# Altium PCB Copy of PCB1.PcbDoc (part 1 of 3)
Units mil, origin at the board's own origin, x right, y up, seen from the top; angles counter-clockwise.
Board outline 3937.01 x 3937.01 mil, 4 copper layers (L1, L2, L3, L4), stack 61.822 mil thick; 181 components, 253 nets, 1103 pads, 337 vias.
Unrouted connection lines stored in the file: 142.
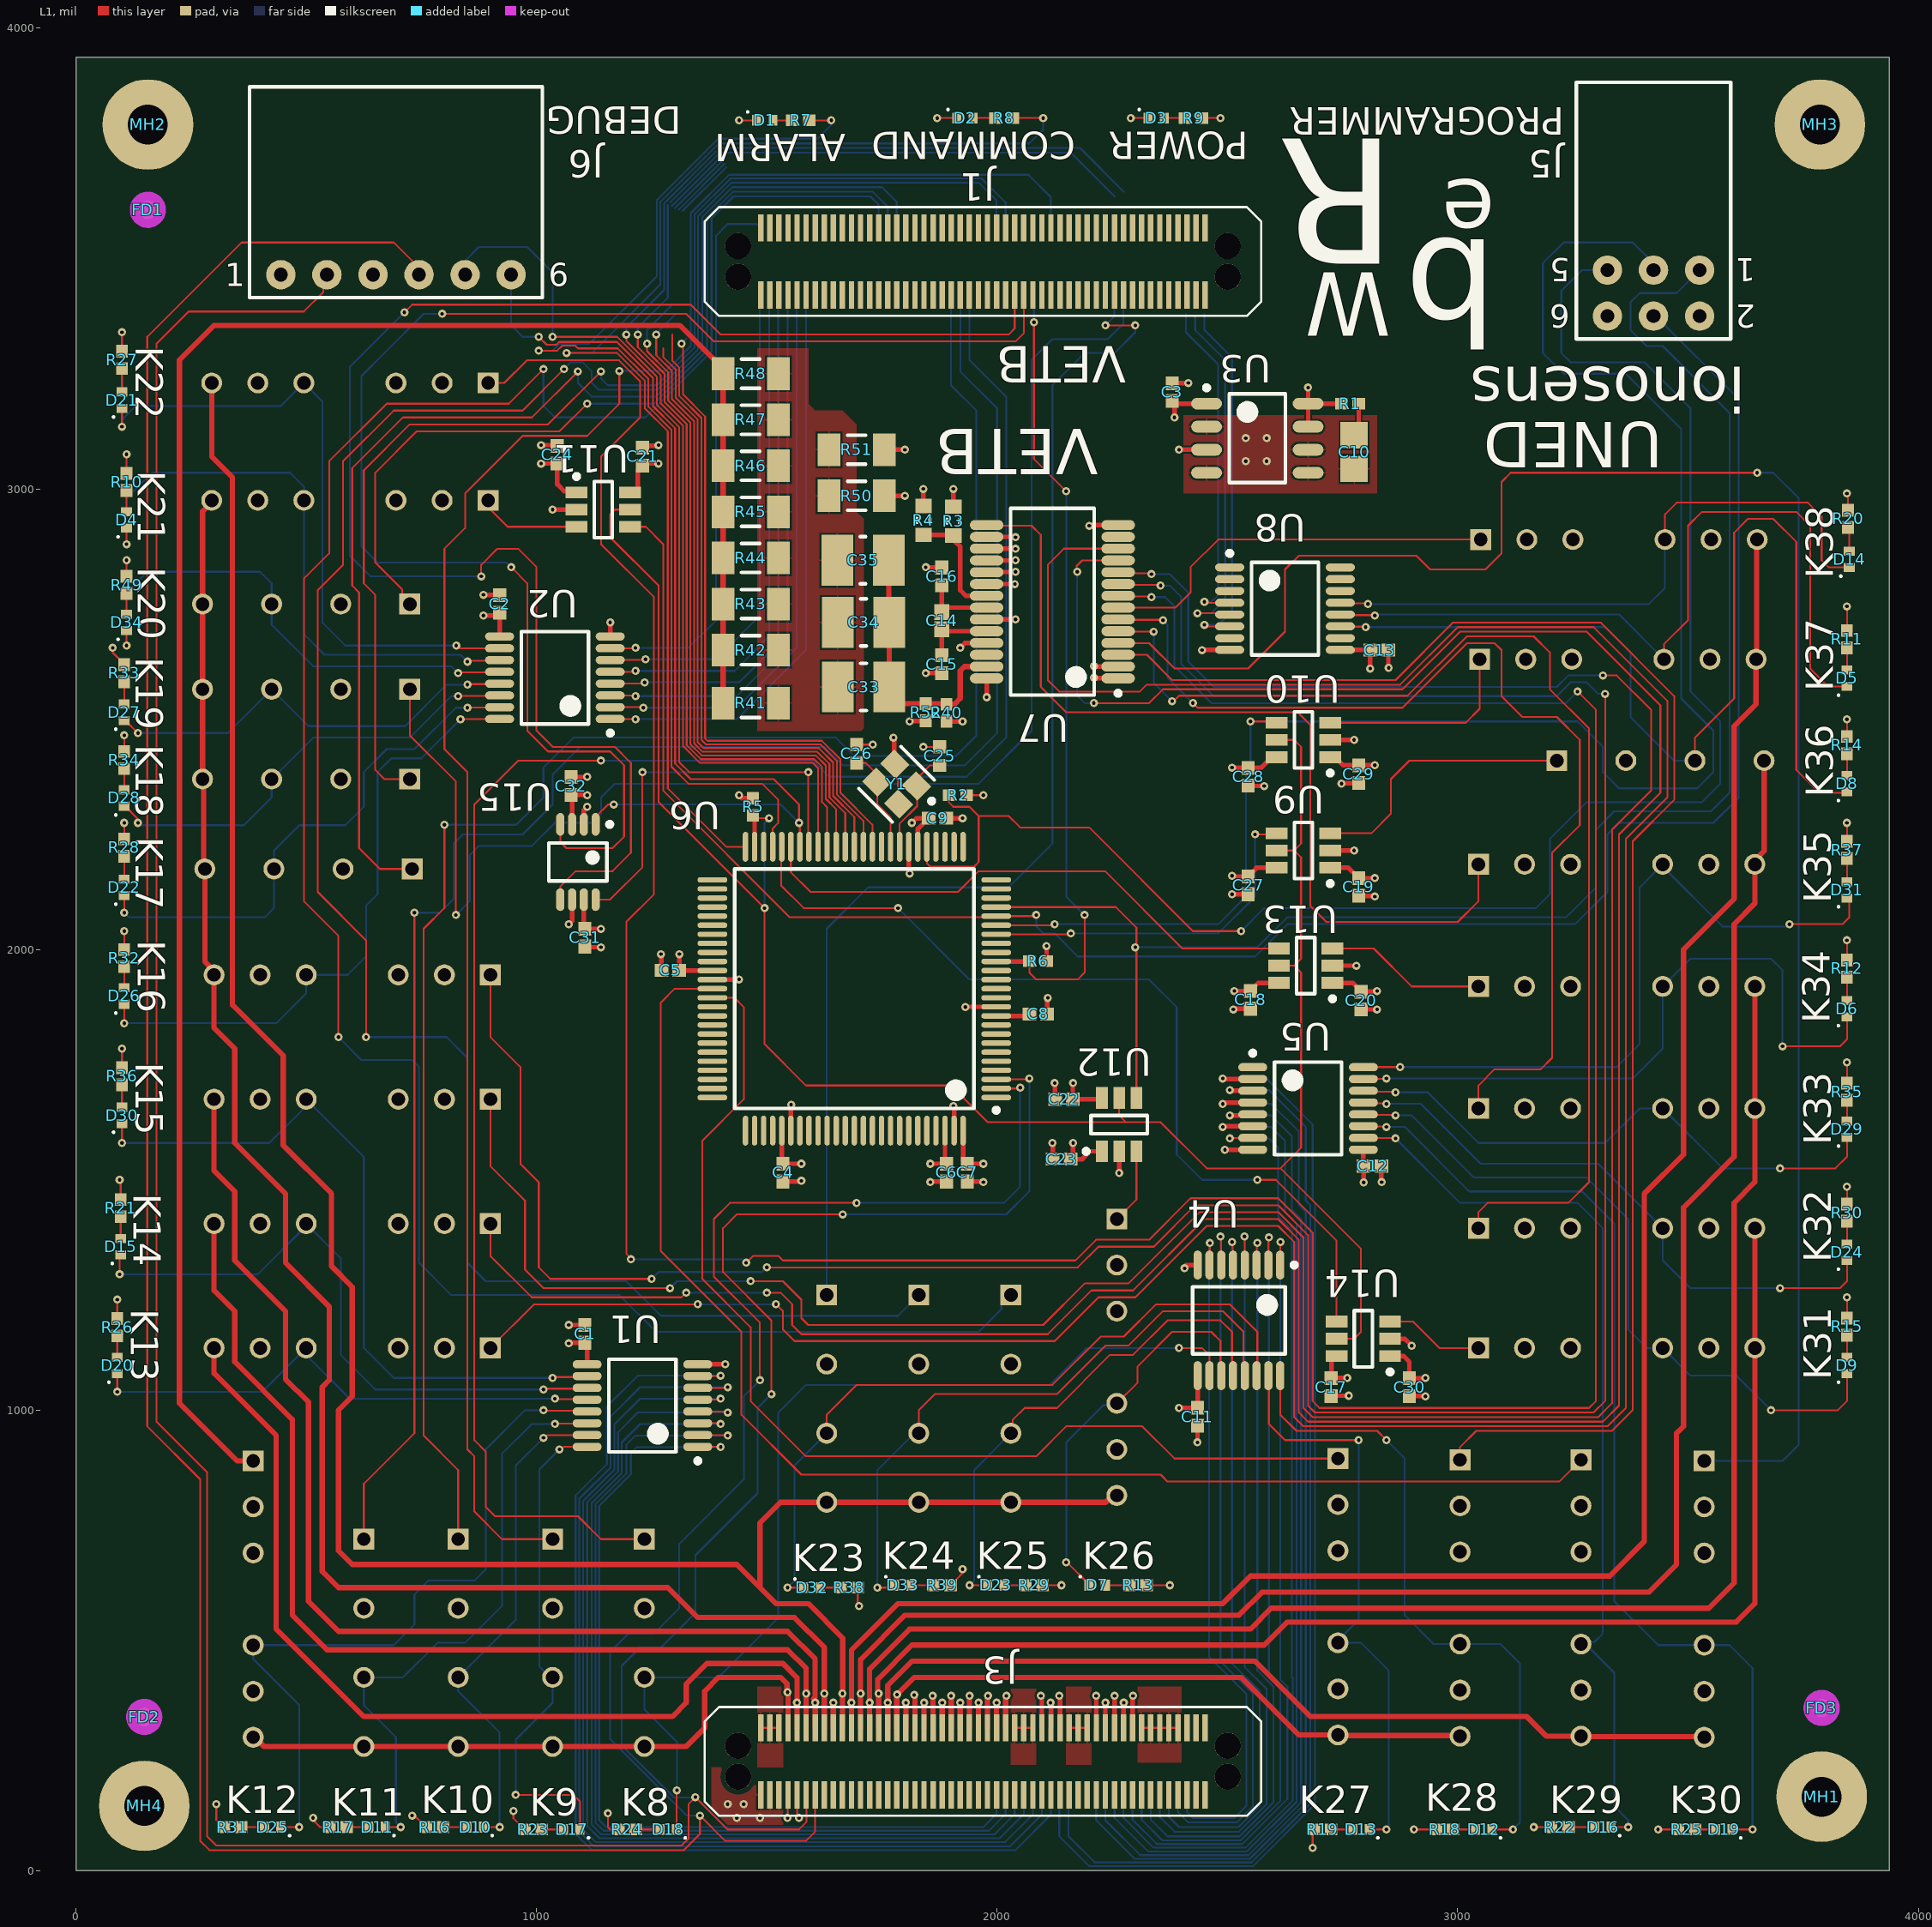
[diagram p0: L1 view]
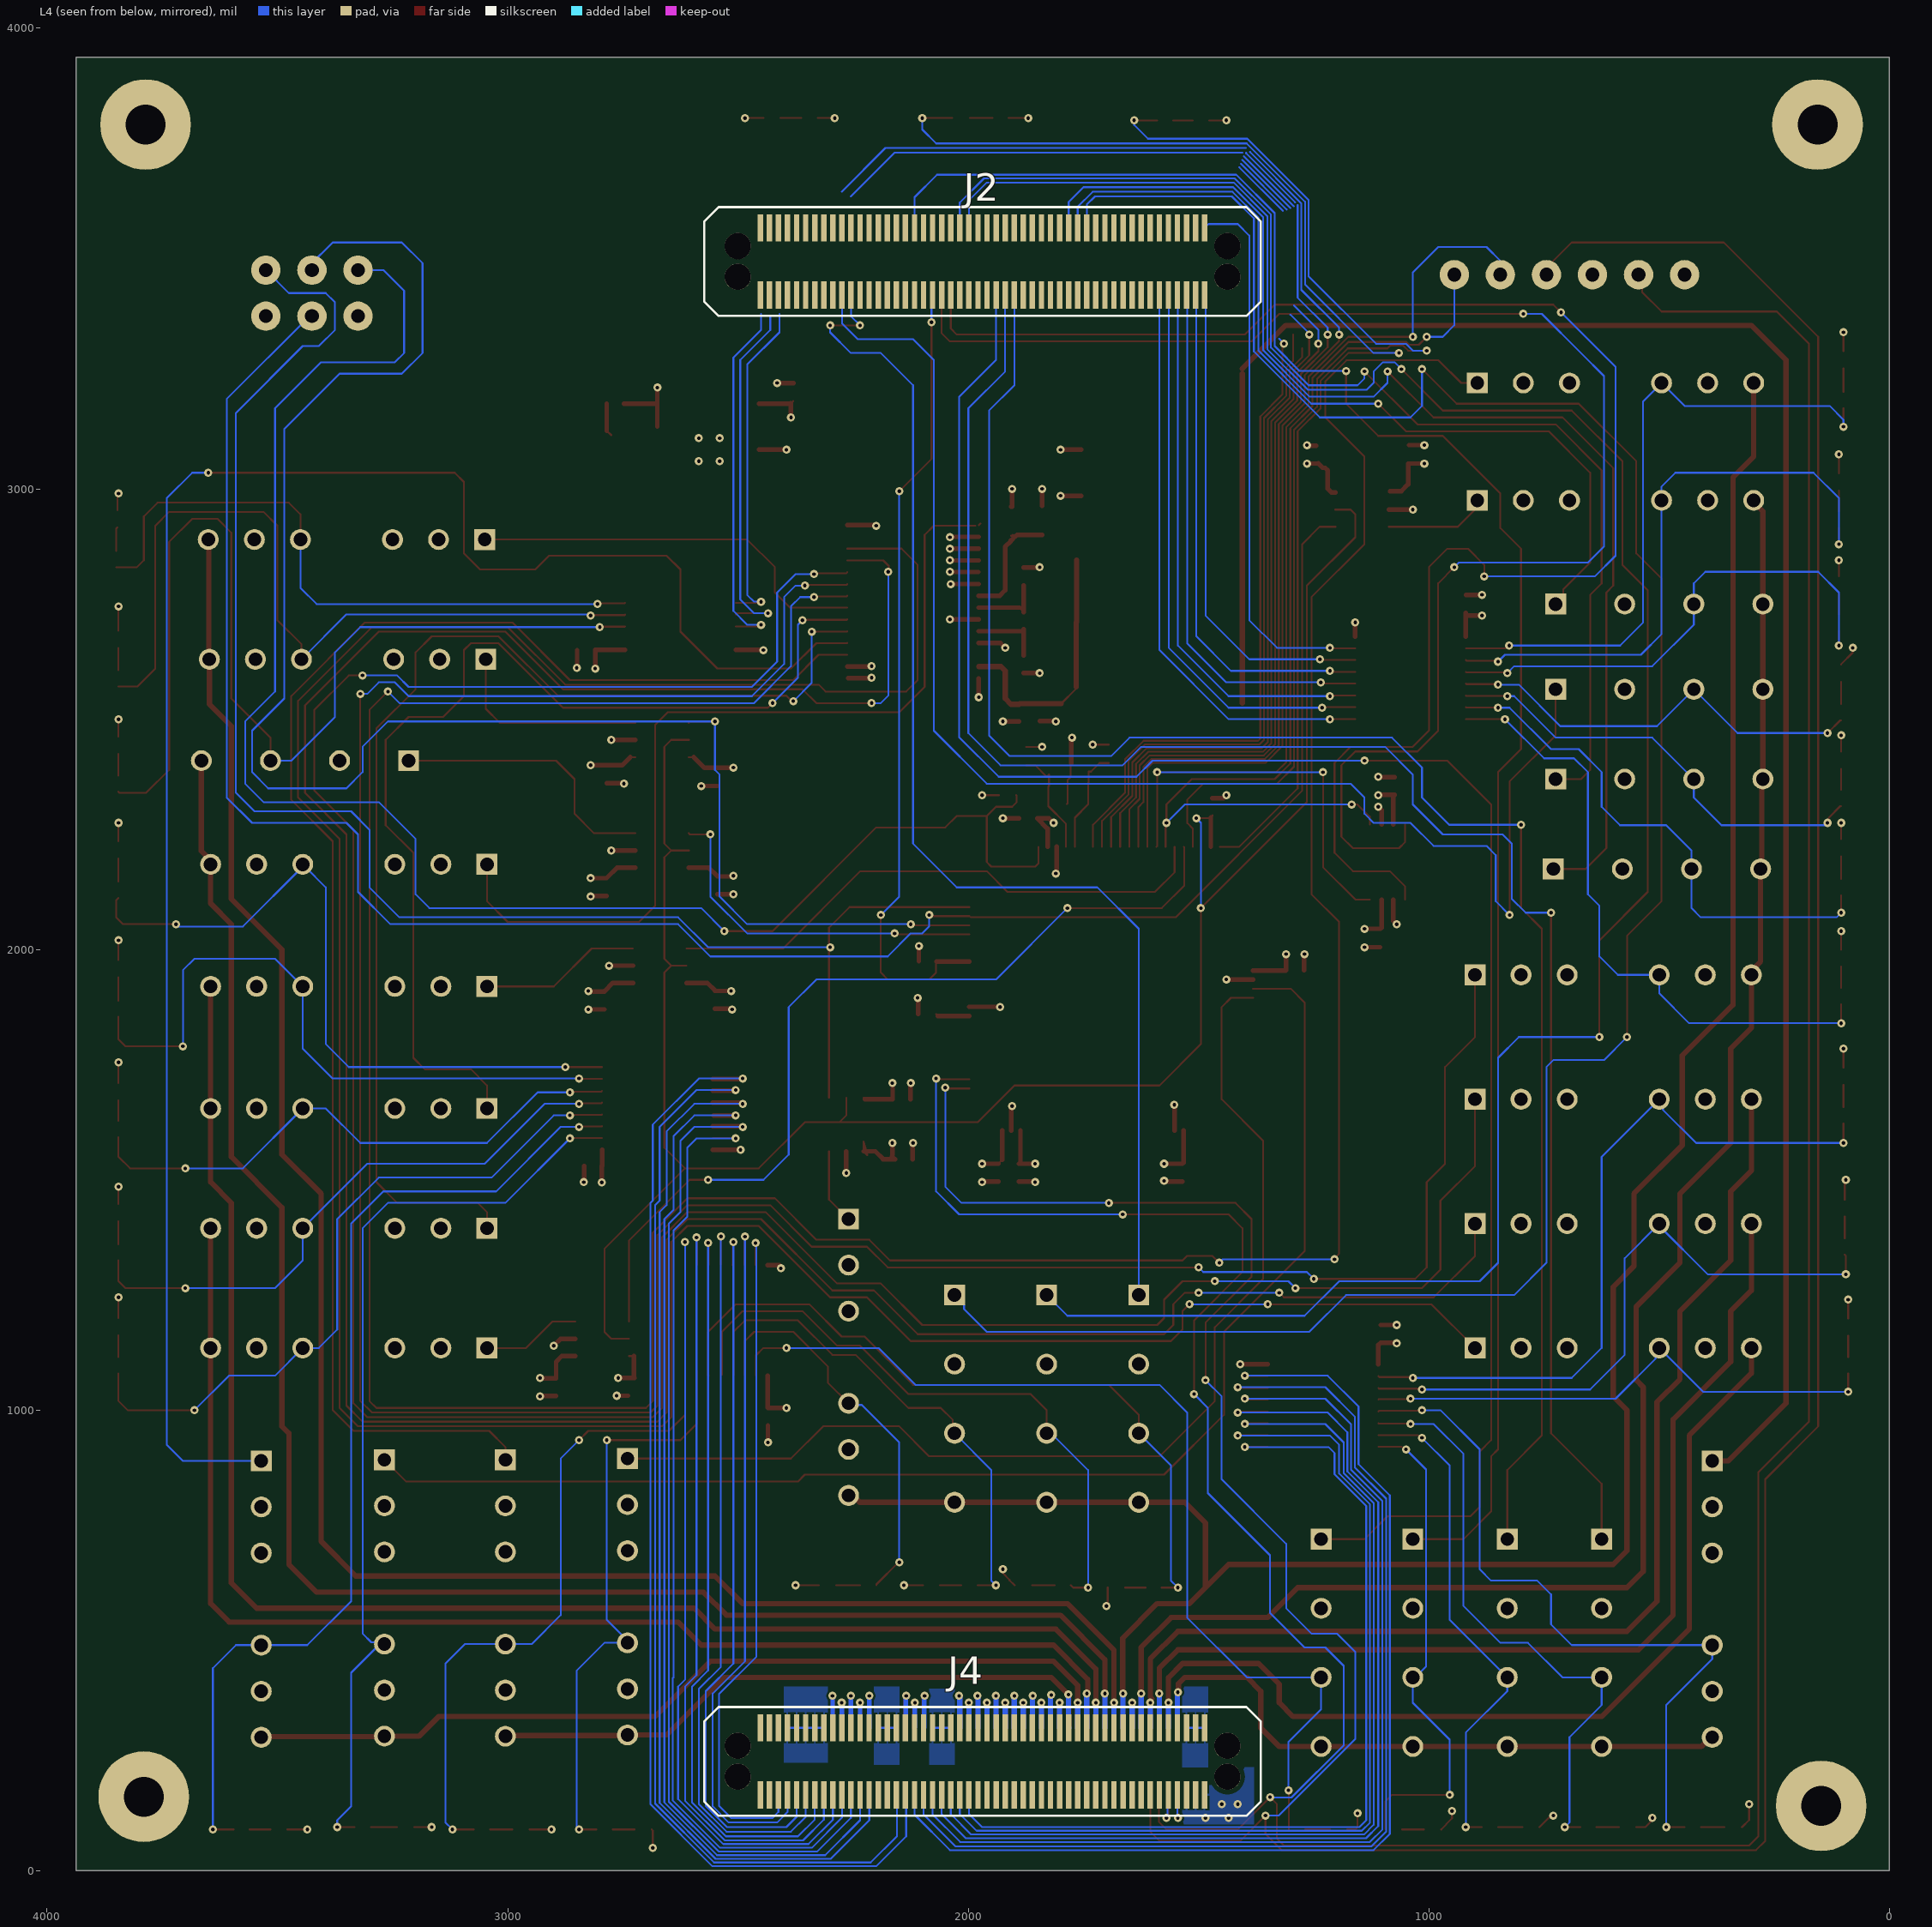
[diagram p1: L4 view, seen from below]
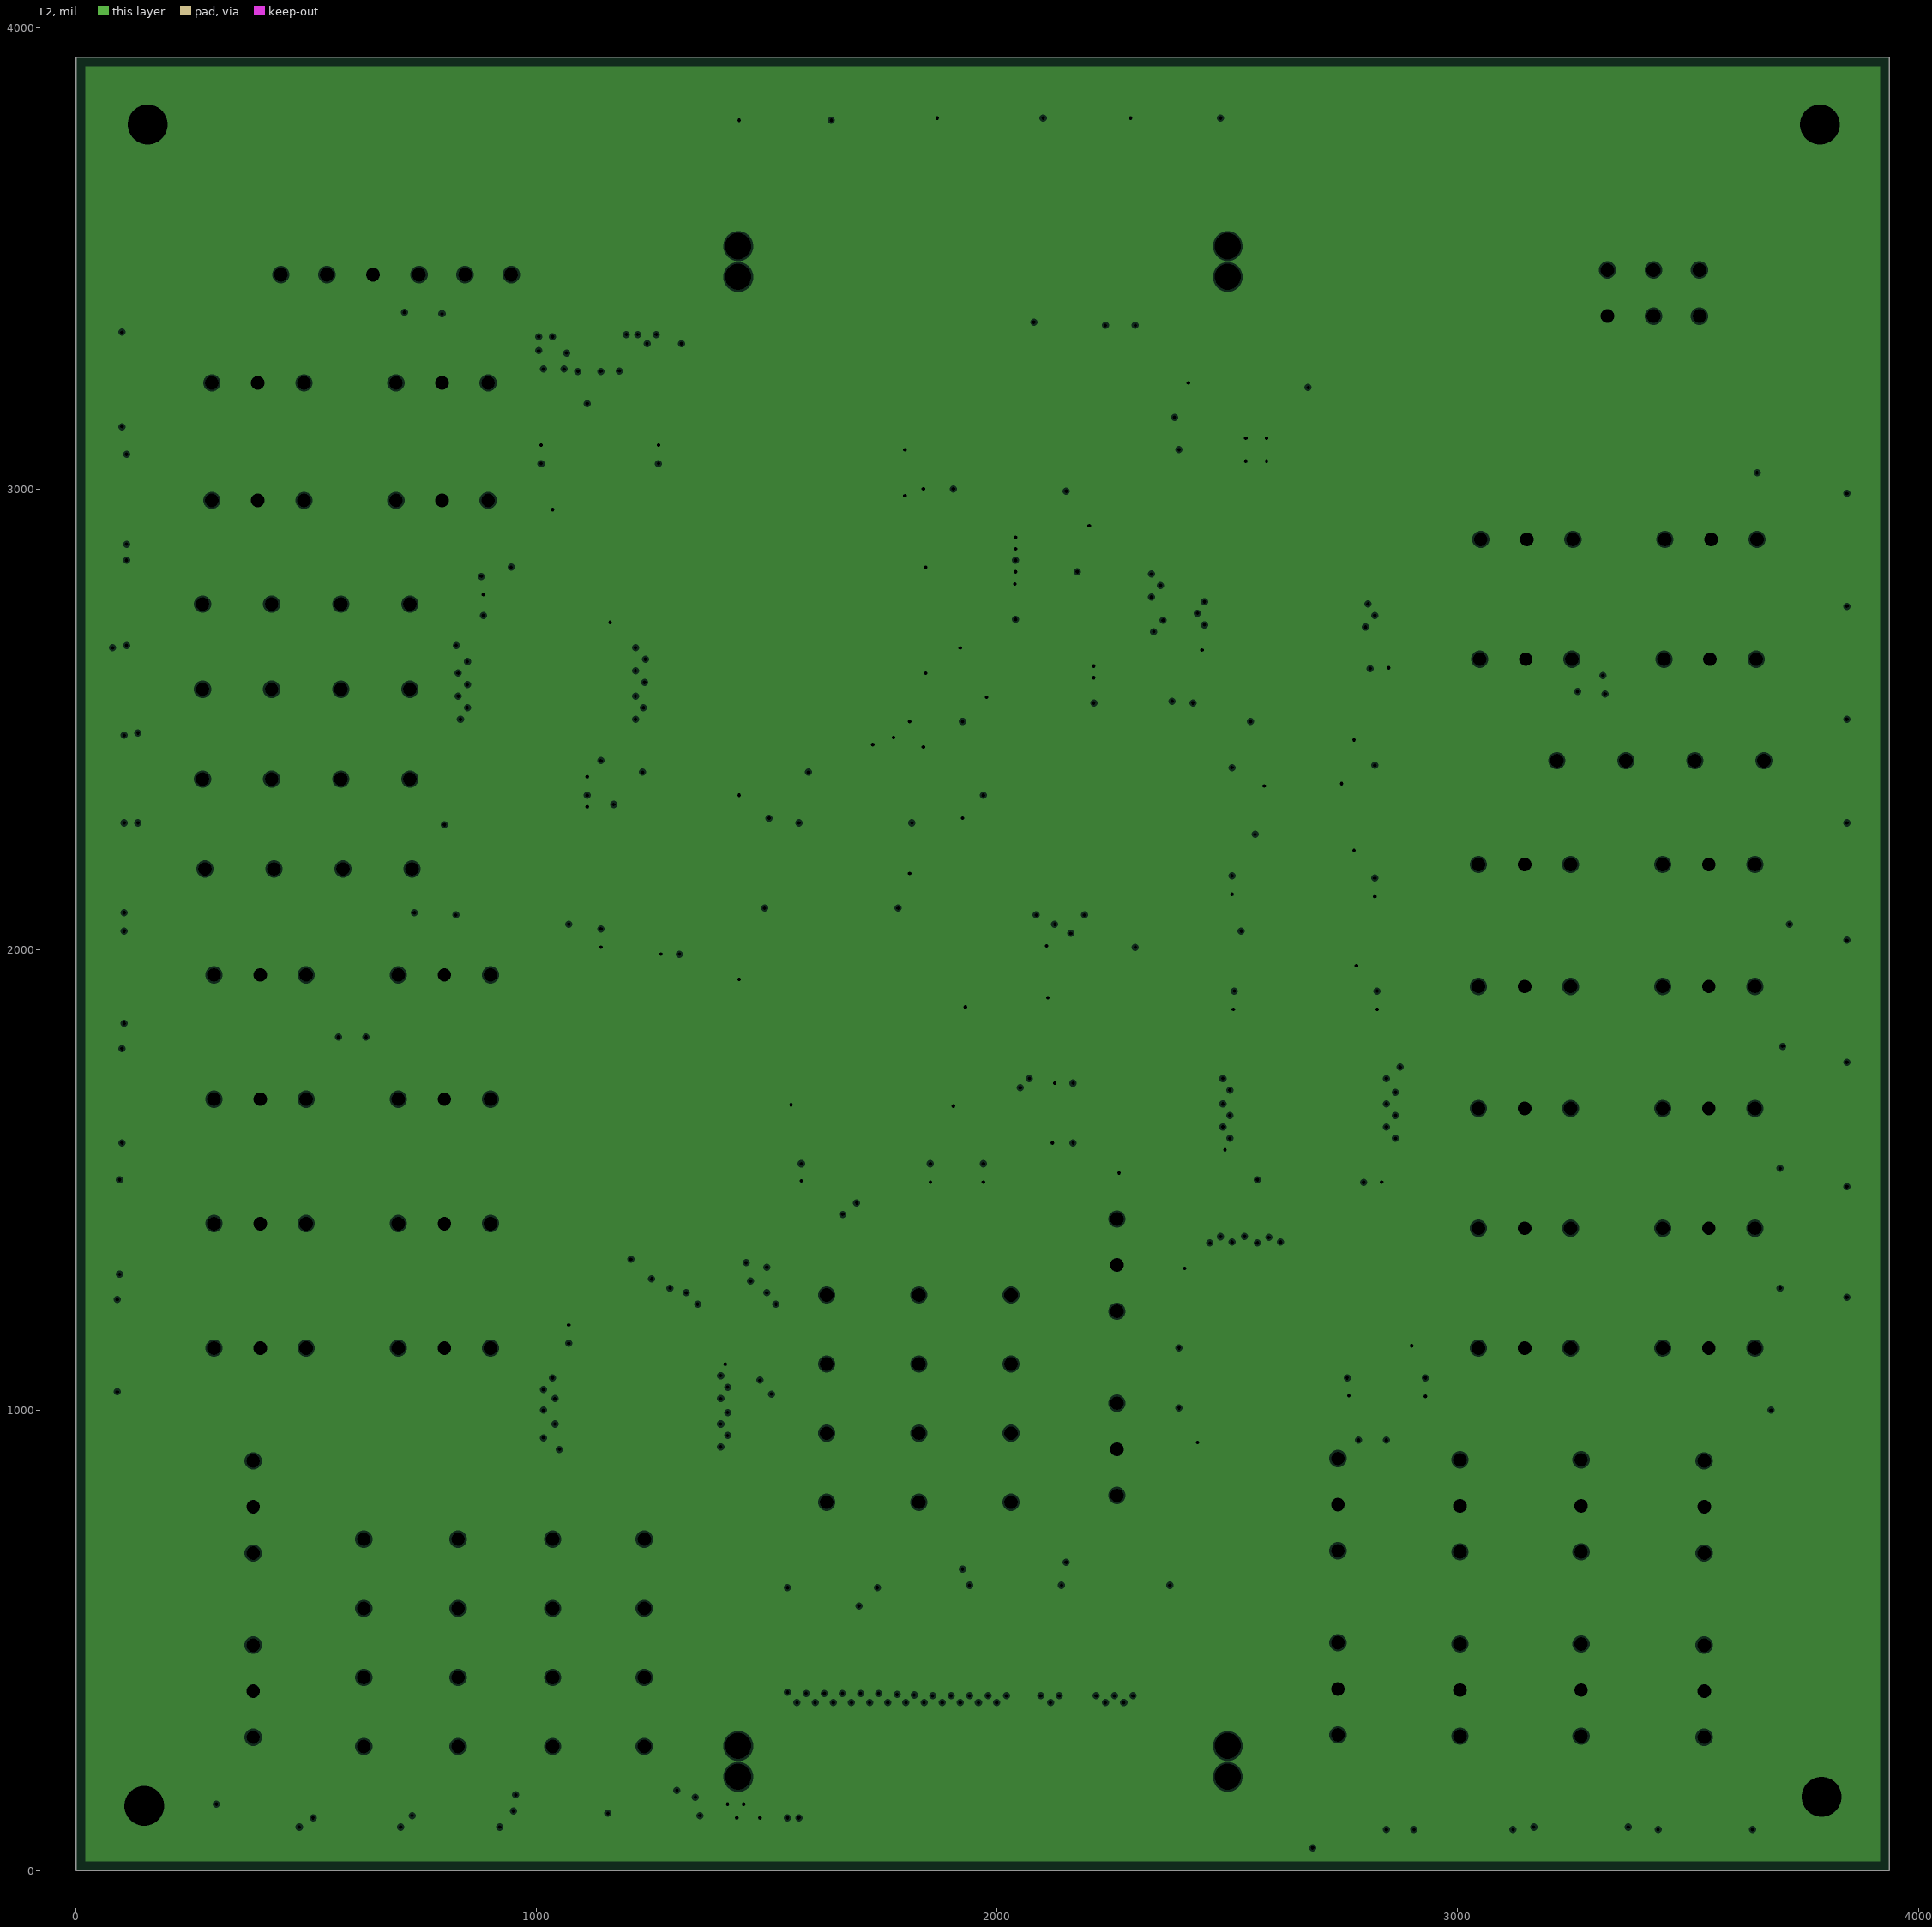
[diagram p2: L2, clearances drawn from the general rule]
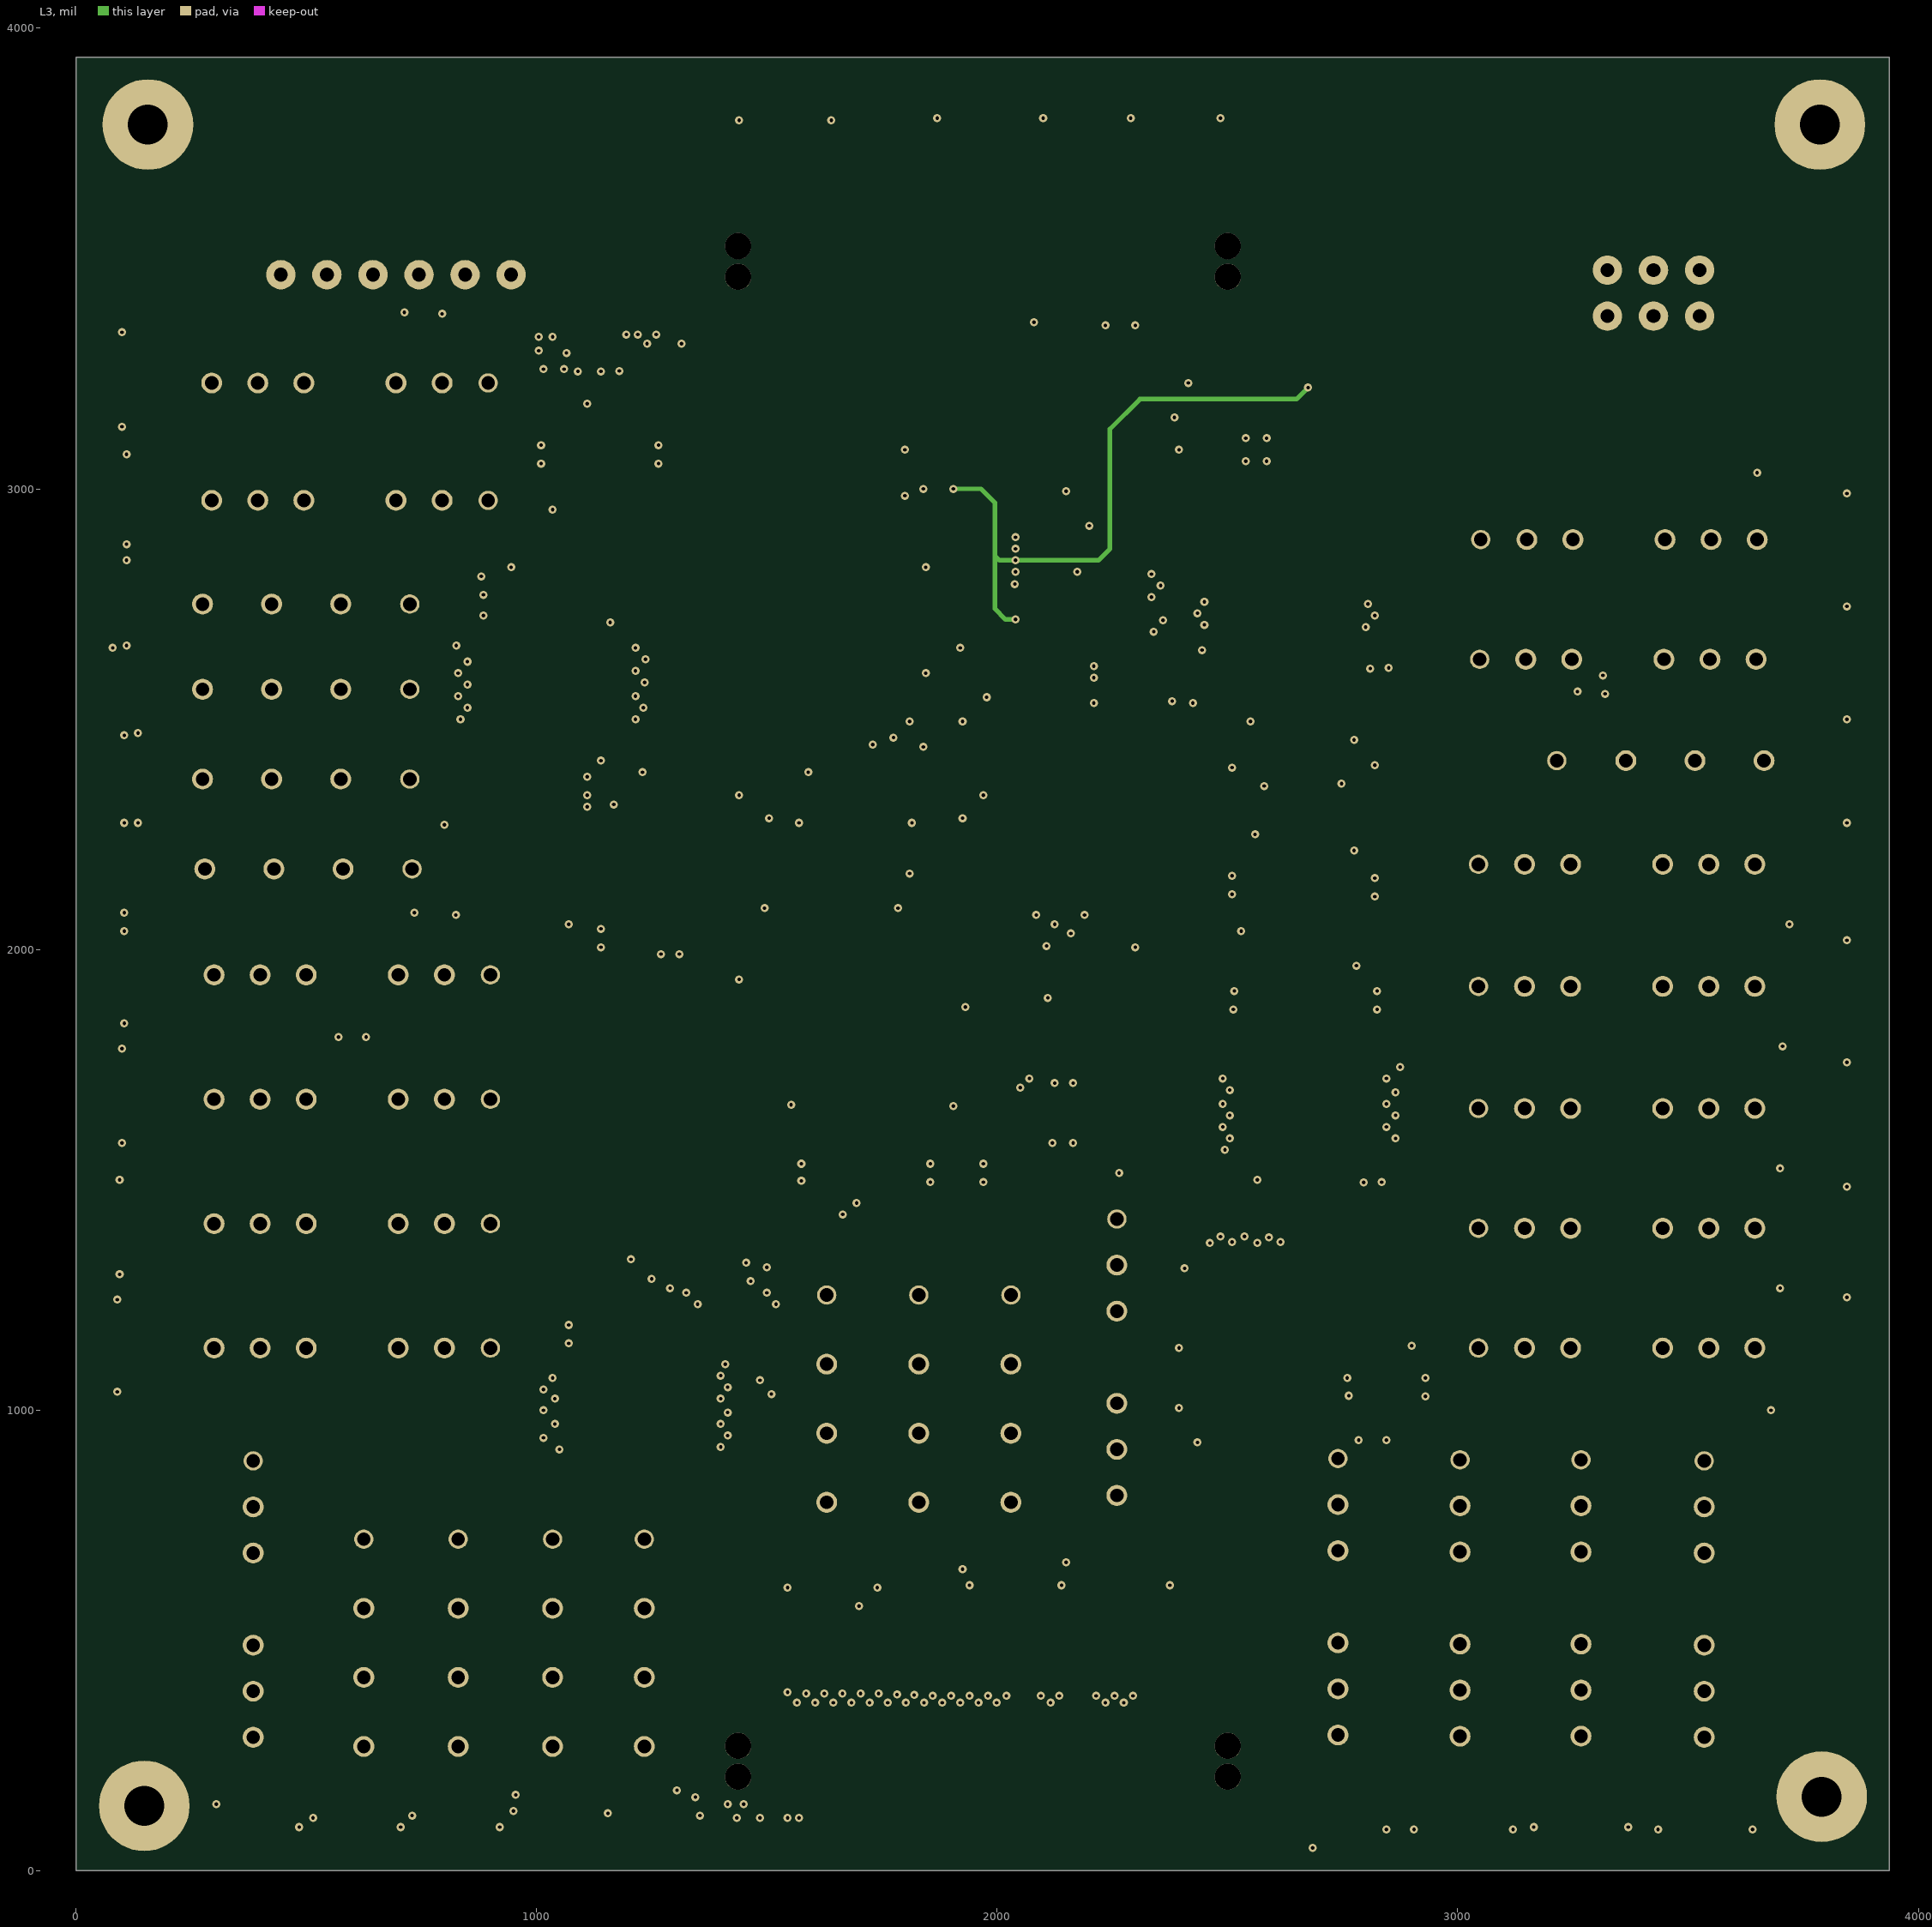
[diagram p3: L3]

## Layer stack, top to bottom
Top Mask: solder mask 0.5906, Solder Resist, Dk 3.8
L1: signal copper 1.378
Dielectric 1: prepreg 7.874, 7628, Dk 4.6
L2: plane copper 0.7, net GND
Core: core 41.9291, FR-4, Dk 4.5
L3: signal copper 0.689
Dielectric 2: prepreg 7.874, 7628, Dk 4.6
L4: signal copper 1.378
Bottom Mask: solder mask 0.5906, Solder Resist, Dk 3.8

## Board outline
0.25,0.25 3937.26,0.25 3937.26,3937.26 0.25,3937.26

## Design rules (kind name [scope] priority, off if disabled: settings)
BoardOutlineClearance [All] p1: gap=7.87 ignorepadtopadclearanceinfootprint=FALSE
Clearance [All] p1: gap=4 ignorepadtopadclearanceinfootprint=FALSE except(5: Arc-Via Track-Via SMDPad-Via THPad-Via Via-Via Via-Fill Via-Poly Via-Region Via-Text; 9.84: Arc-Hole Track-Hole SMDPad-Hole THPad-Hole Via-Hole Fill-Hole Poly-Hole Region-Hole Text-Hole)
Clearance Clearance_keepout [OnLayer('Keep-Out Layer')] p2: gap=100 ignorepadtopadclearanceinfootprint=FALSE except(9.84: Arc-Hole Track-Hole SMDPad-Hole THPad-Hole Via-Hole Fill-Hole Poly-Hole Region-Hole Text-Hole; 25: Arc-THPad Track-THPad SMDPad-THPad THPad-THPad THPad-Via THPad-Fill THPad-Poly THPad-Region THPad-Text)
ComponentClearance [All] p1: gap=4 collisioncheckmode=3 verticalgap=4 showdistances=TRUE
DiffPairsRouting [All] p1: maxlimit=4 minlimit=4 mostfreqgap=4 toplayer_minwidth=4 toplayer_maxwidth=71497.94 toplayer_prefwidth=4 midlayer14_minwidth=4 midlayer14_maxwidth=71497.94 midlayer14_prefwidth=4 bottomlayer_minwidth=4 bottomlayer_maxwidth=71497.94 bottomlayer_prefwidth=4 maxuncoupledlength=500
Height [All] p1: minheight=0 maxheight=71497.94 prefheight=500
HoleSize [All] p1: absolutevalues=TRUE maxlimit=248.03 minlimit=7.87 maxpercent=80.000 minpercent=20.000
HoleToHoleClearance [All] p1: gap=9.84 allowstackedmicrovias=FALSE
MinimumAnnularRing [All] p1: minimumring=3
MinimumSolderMaskSliver [All] p1: minsoldermaskwidth=0
PlaneClearance [All] p1: clearance=4
PlaneConnect PlaneConnectPowerPads [InPadClass('PowerPads')] p1: planeconnectstyle=Direct reliefexpansion=20 reliefentries=4 reliefconductorwidth=10 reliefairgap=10
PlaneConnect [All] p2: pad.planeconnectstyle=Relief pad.reliefexpansion=11.81 pad.reliefentries=4 pad.reliefconductorwidth=4 pad.reliefairgap=4 via.planeconnectstyle=Direct via.reliefexpansion=11.81 via.reliefentries=4 via.reliefconductorwidth=5 via.reliefairgap=5
PolygonConnect PolygonConnectPowerPads [All vs (InPadClass('PowerPads'))] p1: connectstyle=Direct reliefconductorwidth=10 reliefentries=4 polygonreliefangle="90 Angle" airgapwidth=10
PolygonConnect [All] p2: thpad.connectstyle=Relief thpad.reliefconductorwidth=4 thpad.reliefentries=4 thpad.polygonreliefangle="90 Angle" thpad.airgapwidth=4 smdpad.connectstyle=Relief smdpad.reliefconductorwidth=4 smdpad.reliefentries=4 smdpad.polygonreliefangle="90 Angle" smdpad.airgapwidth=4 via.connectstyle=Direct via.reliefconductorwidth=5 via.reliefentries=4 via.polygonreliefangle="90 Angle" via.airgapwidth=5
RoutingVias [All] p1: holewidth=7.87 width=17.72 viastyle="Through Hole" minholewidth=7.87 minwidth=17.72 maxholewidth=248.03 maxwidth=257.87
SilkToSilkClearance [All] p1: silktosilkclearance=0
SilkToSolderMaskClearance [IsPad] p1: minsilkscreentomaskgap=4 clearancetoexposedcopper=TRUE
SolderMaskExpansion [All] p1: expansion=2.95 istentingtop=FALSE
Width Width_50ohm [InNetClass('Nodes')] p1: maxlimit=11.55 minlimit=10 preferedwidth=11.55 toplayer_minwidth=11.55 bottomlayer_minwidth=11.55 impedanceprofiledriven=TRUE impedanceprofileid={67C10FAE-C757-4667-B645-72E10606D8EE} minimp=50.000000 maximp=50.000000 favimp=50.000000
Width [All] p2: maxlimit=71497.94 minlimit=4 preferedwidth=4
20 further rules are at their usual default settings.

## Classes and differential pairs
net class Nodes: A B C D E F G H I J K L M N O P Q R S T U W X Y Z
component class Sheet3: FD1 FD2 FD3 J1 J2 J3 J4 J5 J6 MH1 MH2 MH3 MH4
component class Sheet2: C33 C34 C35 D4 D5 D6 D7 D8 D9 D10 D11 D12 D13 D14 D15 D16 D17 D18 D19 D20 D21 D22 D23 D24 D25 D26 D27 D28 D29 D30 D31 D32 D33 D34 K8 K9 K10 K11 K12 K13 K14 K15 K16 K17 K18 K19 K20 K21 K22 K23 K24 K25 K26 K27 K28 K29 K30 K31 K32 K33 K34 K35 K36 K37 K38 R10 R11 R12 R13 R14 R15 R16 R17 R18 R19 R20 R21 R22 R23 R24 R25 R26 R27 R28 R29 R30 R31 R32 R33 R34 R35 R36 R37 R38 R39 R40 R41 R42 R43 R44 R45 R46 R47 R48 R49 R50 R51 R52
component class Sheet1: C1 C2 C3 C4 C5 C6 C7 C8 C9 C10 C11 C12 C13 C14 C15 C16 C17 C18 C19 C20 C21 C22 C23 C24 C25 C26 C27 C28 C29 C30 C31 C32 D1 D2 D3 R1 R2 R3 R4 R5 R6 R7 R8 R9 U1 U2 U3 U4 U5 U6 U7 U8 U9 U10 U11 U12 U13 U14 U15 Y1

## Components (designator, comment, footprint, x,y, rotation, side; value= is the part's Value field where it differs from the comment)
C1 "CC0402JRX7R7BB104" CAPC1005X06M#1 1105,1165.71 r270 top value=100nF
C2 "CC0402JRX7R7BB104" CAPC1005X06M#1 920,2750 r270 top value=100nF
C3 "CC0402JRX7R7BB104" CAPC1005X06M#1 2380,3210 r270 top value=100nF
C4 "CC0402JRX7R7BB104" CAPC1005X06M#1 1535,1515.71 r90 top value=100nF
C5 "CC0402JRX7R7BB104" CAPC1005X06M#1 1290.71,1955 r0 top value=100nF
C6 "CC0402JRX7R7BB104" CAPC1005X06M#1 1890,1515.71 r90 top value=100nF
C7 "CC0402JRX7R7BB104" CAPC1005X06M#1 1935,1515.71 r90 top value=100nF
C8 "CC0402JRX7R7BB104" CAPC1005X06M#1 2089.29,1860 r180 top value=100nF
C9 "CC0402JRX7R7BB104" CAPC1005X06M#1 1870.71,2285 r180 top value=100nF
C10 "AC0805KKX7R8BB225" CAPC2012X14M 2775,3080 r90 top value=2.2µF
C11 "CC0402JRX7R7BB104" CAPC1005X06M#1 2435,985.71 r90 top value=100nF
C12 "CC0402JRX7R7BB104" CAPC1005X06M#1 2815,1530 r180 top value=100nF
C13 "CC0402JRX7R7BB104" CAPC1005X06M#1 2830,2650 r180 top value=100nF
C14 "CC0402MRX5R6BB106" CAPC1005X07M 1880,2713.9 r270 top value=10µF
C15 "CC0402JRX7R7BB104" CAPC1005X06M#1 1880,2619.29 r90 top value=100nF
C16 "CC0402JRX7R7BB104" CAPC1005X06M#1 1880,2810 r270 top value=100nF
C17 "CC0402JRX7R7BB104" CAPC1005X06M#1 2725,1050 r90 top value=100nF
C18 "CC0402JRX7R7BB104" CAPC1005X06M#1 2550,1890.71 r90 top value=100nF
C19 "CC0402JRX7R7BB104" CAPC1005X06M#1 2785,2135.71 r90 top value=100nF
C20 "CC0402JRX7R7BB104" CAPC1005X06M#1 2790,1889.29 r90 top value=100nF
C21 "CC0402JRX7R7BB104" CAPC1005X06M#1 1230,3070 r270 top value=100nF
C22 "CC0402JRX7R7BB104" CAPC1005X06M#1 2145,1675 r0 top value=100nF
C23 "CC0402JRX7R7BB104" CAPC1005X06M#1 2140,1545 r0 top value=100nF
C24 "CC0402JRX7R7BB104" CAPC1005X06M#1 1045,3074.29 r270 top value=100nF
C25 "CC0402JRNPO9BN200" CAPC1005X06M#2 1875,2420 r270 top value=20pF
C26 "CC0402JRNPO9BN200" CAPC1005X06M#2 1695,2425 r270 top value=20pF
C27 "CC0402JRX7R7BB104" CAPC1005X06M#1 2545,2139.29 r90 top value=100nF
C28 "CC0402JRX7R7BB104" CAPC1005X06M#1 2545,2375 r90 top value=100nF
C29 "CC0402JRX7R7BB104" CAPC1005X06M#1 2785,2380.71 r90 top value=100nF
C30 "CC0402JRX7R7BB104" CAPC1005X06M#1 2895,1050 r90 top value=100nF
C31 "CC0402JRX7R7BB104" CAPC1005X06M#1 1105,2025.71 r90 top value=100nF
C32 "CC0402JRX7R7BB104" CAPC1005X06M#1 1075,2355 r270 top value=100nF
C33 "EMK325ABJ107MM-P" CAPC3225X27M 1710,2570 r0 top value=100µF
C34 "EMK325ABJ107MM-P" CAPC3225X27M 1710,2710 r0 top value=100µF
C35 "EMK325ABJ107MM-P" CAPC3225X27M 1708.9,2845 r0 top value=100µF
D1 "SML-P12UTT86R" DIOC1005X02R 1495,3800 r0 top
D2 "SML-P12UTT86R" DIOC1005X02R 1930,3805 r0 top
D3 "SML-P12UTT86R" DIOC1005X02R 2345,3805 r0 top
D4 "SML-P13PTT86R" DIOC1005X02R 110,2932.62 r90 top
D5 "SML-P13PTT86R" DIOC1005X02R 3845,2588.7 r90 top
D6 "SML-P13PTT86R" DIOC1005X02R 3845,1871.32 r90 top
D7 "SML-P13PTT86R" DIOC1005X02R 2217.18,620 r0 top
D8 "SML-P13PTT86R" DIOC1005X02R 3845,2360.02 r90 top
D9 "SML-P13PTT86R" DIOC1005X02R 3845,1097.18 r90 top
D10 "SML-P13PTT86R" DIOC1005X02R 867.4,95 r180 top
D11 "SML-P13PTT86R" DIOC1005X02R 654.01,95 r180 top
D12 "SML-P13PTT86R" DIOC1005X02R 3056.3,90 r180 top
D13 "SML-P13PTT86R" DIOC1005X02R 2790,90 r180 top
D14 "SML-P13PTT86R" DIOC1005X02R 3850,2847.18 r90 top
D15 "SML-P13PTT86R" DIOC1005X02R 97.32,1355 r90 top
D16 "SML-P13PTT86R" DIOC1005X02R 3315,95 r180 top
D17 "SML-P13PTT86R" DIOC1005X02R 1076.4,90 r180 top
D18 "SML-P13PTT86R" DIOC1005X02R 1286.3,90 r180 top
D19 "SML-P13PTT86R" DIOC1005X02R 3577.82,90 r180 top
D20 "SML-P13PTT86R" DIOC1005X02R 90,1097.18 r90 top
D21 "SML-P13PTT86R" DIOC1005X02R 100,3192.62 r90 top
D22 "SML-P13PTT86R" DIOC1005X02R 105,2135 r90 top
D23 "SML-P13PTT86R" DIOC1005X02R 1997.18,620 r0 top
D24 "SML-P13PTT86R" DIOC1005X02R 3845,1342.62 r90 top
D25 "SML-P13PTT86R" DIOC1005X02R 427.38,95 r180 top
D26 "SML-P13PTT86R" DIOC1005X02R 105,1898.92 r90 top
D27 "SML-P13PTT86R" DIOC1005X02R 105,2515 r90 top
D28 "SML-P13PTT86R" DIOC1005X02R 105,2328.92 r90 top
D29 "SML-P13PTT86R" DIOC1005X02R 3845,1610 r90 top
D30 "SML-P13PTT86R" DIOC1005X02R 100,1640 r90 top
D31 "SML-P13PTT86R" DIOC1005X02R 3845,2129.59 r90 top
D32 "SML-P13PTT86R" DIOC1005X02R 1597.62,615 r0 top
D33 "SML-P13PTT86R" DIOC1005X02R 1795,620 r0 top
D34 "SML-P13PTT86R" DIOC1005X02R 110,2710 r90 top
FD1 "FID1X2R" FID1X2R 156.26,3605.79 r90 top
FD2 "FID1X2R" FID1X2R 148.39,334.13 r90 top
FD3 "FID1X2R" FID1X2R 3790.12,353.66 r90 top
J1 "LSHM-150-06.0-L-DV-A-N-K-TR" LSHM_150_06_0_L_DV_A_N_K_TR 1969.25,3493.58 r180 top
J2 "LSHM-150-06.0-L-DV-A-N-K-TR" LSHM_150_06_0_L_DV_A_N_K_TR 1969.25,3493.58 r180 bottom
J3 "LSHM-150-06.0-L-DV-A-N-K-TR" LSHM_150_06_0_L_DV_A_N_K_TR 1969.25,237.68 r180 top
J4 "LSHM-150-06.0-L-DV-A-N-K-TR" LSHM_150_06_0_L_DV_A_N_K_TR 1969.25,237.68 r180 bottom
J5 "TSW-103-08-F-D-RA" TSW-103-08-F-D-RA 3425,3585 r180 top
J6 "HTSW-106-08-F-S-RA" TSW-106-08-F-S-RA 695,3575 r0 top
K8 "3570.1419.051" 3570.1419 1234.02,495 r270 top
K9 "3570.1419.051" 3570.1419 1035,495 r270 top
K10 "3570.1419.051" 3570.1419 830,495 r270 top
K11 "3570.1419.051" 3570.1419 625,495 r270 top
K12 "9002-05-00" "SIP564W40P254L1980H810Q6 - Cloned" 385,590 r270 top
K13 "9002-05-00" "SIP564W40P254L1980H810Q6 - Cloned" 600,1135 r180 top
K14 "9002-05-00" "SIP564W40P254L1980H810Q6 - Cloned" 600,1405 r180 top
K15 "9002-05-00" "SIP564W40P254L1980H810Q6 - Cloned" 600,1675 r180 top
K16 "9002-05-00" "SIP564W40P254L1980H810Q6 - Cloned" 600,1945 r180 top
K17 "3570.1419.051" 3570.1419 505,2175 r180 top
K18 "3570.1419.051" 3570.1419 500,2370 r180 top
K19 "3570.1419.051" 3570.1419 500,2565 r180 top
K20 "3570.1419.051" 3570.1419 500,2750 r180 top
K21 "9002-05-00" "SIP564W40P254L1980H810Q6 - Cloned" 595,2975 r180 top
K22 "9002-05-00" "SIP564W40P254L1980H810Q6 - Cloned" 595,3230 r180 top
K23 "3570.1419.051" 3570.1419 1630,1025 r270 top
K24 "3570.1419.051" 3570.1419 1830,1025 r270 top
K25 "3570.1419.051" 3570.1419 2030,1025 r270 top
K26 "9002-05-00" "SIP564W40P254L1980H810Q6 - Cloned" 2260,1115 r270 top
K27 "9002-05-00" "SIP564W40P254L1980H810Q6 - Cloned" 2740,595 r270 top
K28 "9002-05-00" "SIP564W40P254L1980H810Q6 - Cloned" 3005,592.32 r270 top
K29 "9002-05-00" "SIP564W40P254L1980H810Q6 - Cloned" 3267.6,592.36 r270 top
K30 "9002-05-00" "SIP564W40P254L1980H810Q6 - Cloned" 3535,590 r270 top
K31 "9002-05-00" "SIP564W40P254L1980H810Q6 - Cloned" 3345,1135 r0 top
K32 "9002-05-00" "SIP564W40P254L1980H810Q6 - Cloned" 3345,1395 r0 top
K33 "9002-05-00" "SIP564W40P254L1980H810Q6 - Cloned" 3345,1655 r0 top
K34 "9002-05-00" "SIP564W40P254L1980H810Q6 - Cloned" 3345,1920 r0 top
K35 "9002-05-00" "SIP564W40P254L1980H810Q6 - Cloned" 3345,2185 r0 top
K36 "3570.1419.051" 3570.1419 3440,2410 r0 top
K37 "9002-05-00" "SIP564W40P254L1980H810Q6 - Cloned" 3347.68,2630 r0 top
K38 "9002-05-00" "SIP564W40P254L1980H810Q6 - Cloned" 3350,2890 r0 top
MH1 "C500h220" C500h220z368#1 3755,200 r0 top
MH2 "C500h220" C500h220z368#2 275,3625 r0 top
MH3 "C500h220" C500h220z368#3 3715,3675 r0 top
MH4 "C500h220" C500h220z368#4 240,165 r0 top
R1 "AC0402FR-071KL" RESC1005X04M 2766.3,3185 r180 top value=1k
R2 "AC0402FR-0710KL" RESC1005X04M 1915,2335 r0 top value=10k
R3 "AC0603FR-07150RL" RESC1608X06N 1905,2930 r90 top value=150
R4 "AC0603FR-07150RL" RESC1608X06N 1840,2931.5 r270 top value=150
R5 "AC0402FR-0710KL" RESC1005X04M 1470,2310 r270 top value=10k
R6 "AC0402FR-0710KL" RESC1005X04M 2088.7,1975 r180 top value=10k
R7 "AC0402FR-07240RL" RESC1005X04M 1573.7,3800 r180 top value=240
R8 "AC0402FR-07240RL" RESC1005X04M 2015,3805 r180 top value=240
R9 "AC0402FR-07240RL" RESC1005X04M 2426.3,3805 r180 top value=240
R10 "AC0402FR-07240RL" RESC1005X04M 110,3015 r270 top value=240
R11 "AC0402FR-07240RL" RESC1005X04M 3845,2673.7 r270 top value=240
R12 "AC0402FR-07240RL" RESC1005X04M 3845,1958.7 r270 top value=240
R13 "AC0402FR-07240RL" RESC1005X04M 2305.87,620 r180 top value=240
R14 "AC0402FR-07240RL" RESC1005X04M 3845,2443.7 r270 top value=240
R15 "AC0402FR-07240RL" RESC1005X04M 3845,1181.3 r270 top value=240
R16 "AC0402FR-07240RL" RESC1005X04M 778.7,95 r0 top value=240
R17 "AC0402FR-07240RL" RESC1005X04M 569.01,95 r0 top value=240
R18 "AC0402FR-07240RL" RESC1005X04M 2971.3,90 r0 top value=240
R19 "AC0402FR-07240RL" RESC1005X04M 2706.3,90 r0 top value=240
R20 "AC0402FR-07240RL" RESC1005X04M 3847.32,2935 r270 top value=240
R21 "AC0402FR-07240RL" RESC1005X04M 97.32,1438.7 r270 top value=240
R22 "AC0402FR-07240RL" RESC1005X04M 3221.3,95 r0 top value=240
R23 "AC0402FR-07240RL" RESC1005X04M 992.72,90 r0 top value=240
R24 "AC0402FR-07240RL" RESC1005X04M 1196.3,90 r0 top value=240
R25 "AC0402FR-07240RL" RESC1005X04M 3496.73,90 r0 top value=240
R26 "AC0402FR-07240RL" RESC1005X04M 90,1180 r270 top value=240
R27 "AC0402FR-07240RL" RESC1005X04M 100,3280 r270 top value=240
R28 "AC0402FR-07240RL" RESC1005X04M 105,2221.3 r270 top value=240
R29 "AC0402FR-07240RL" RESC1005X04M 2080,620 r180 top value=240
R30 "AC0402FR-07240RL" RESC1005X04M 3845,1428.7 r270 top value=240
R31 "AC0402FR-07240RL" RESC1005X04M 340,95 r0 top value=240
R32 "AC0402FR-07240RL" RESC1005X04M 105,1981.3 r270 top value=240
R33 "AC0402FR-07240RL" RESC1005X04M 105,2600 r270 top value=240
R34 "AC0402FR-07240RL" RESC1005X04M 105,2411.3 r270 top value=240
R35 "AC0402FR-07240RL" RESC1005X04M 3845,1691.3 r270 top value=240
R36 "AC0402FR-07240RL" RESC1005X04M 100,1725 r270 top value=240
R37 "AC0402FR-07240RL" RESC1005X04M 3845,2216.3 r270 top value=240
R38 "AC0402FR-07240RL" RESC1005X04M 1678.7,615 r180 top value=240
R39 "AC0402FR-07240RL" RESC1005X04M 1880,620 r180 top value=240
R40 "AC0402FR-072KL" RESC1005X04M 1890,2513.7 r270 top value=2k
R41 "AC1206FR-07300RL" RESC3116X06M 1465,2535 r180 top value=300
R42 "AC1206FR-07300RL" RESC3116X06M 1465,2650 r180 top value=300
R43 "AC1206FR-07300RL" RESC3116X06M 1465,2750 r180 top value=300
R44 "AC1206FR-07300RL" RESC3116X06M 1465.04,2850 r180 top value=300
R45 "AC1206FR-07300RL" RESC3116X06M 1465,2950 r180 top value=300
R46 "AC1206FR-07300RL" RESC3116X06M 1465.04,3050 r180 top value=300
R47 "AC1206FR-07300RL" RESC3116X06M 1465,3150 r180 top value=300
R48 "AC1206FR-07300RL" RESC3116X06M 1465,3250 r180 top value=300
R49 "AC0402FR-07240RL" RESC1005X04M 110,2791.3 r270 top value=240
R50 "AC1206FR-0724R9L" RESC3116X06M 1695.04,2985 r180 top value=24.9
R51 "AC1206FR-0724R9L" RESC3116X06M 1695.04,3085 r180 top value=24.9
R52 "AC0402FR-072KL" RESC1005X04M 1845,2515 r90 top value=2k
U1 "ULN2003AIPWR" TSOP65P640X120-16M 1230,1010 r180 top
U2 "ULN2003AIPWR" TSOP65P640X120-16M 1040,2590 r180 top
U3 "MCP1501-33E/SN" SOIC127P600X175-8M 2565,3110 r0 top
U4 "ULN2003AIPWR" TSOP65P640X120-16M 2525,1195 r270 top
U5 "ULN2003AIPWR" TSOP65P640X120-16M 2675,1655 r0 top
U6 "ATMEGA2560-16AU" ATML-100A_M 1690,1915 r180 top
U7 "AD9200ARSZRL" SOP65P780X198-28M 2120,2755 r180 top
U8 "ULN2003AIPWR" TSOP65P640X120-16M 2625,2740 r0 top
U9 "TXB0101DBVR" SOT95P280X145-6M 2665,2215 r180 top
U10 "TXB0101DBVR" SOT95P280X145-6M 2665,2455 r180 top
U11 "TXB0101DBVR" SOT95P280X145-6M 1145,2955 r0 top
U12 "TXB0101DBVR" SOT95P280X145-6M 2265,1620 r90 top
U13 "TXB0101DBVR" SOT95P280X145-6M 2670,1965 r180 top
U14 "TXB0101DBVR" SOT95P280X145-6M 2795,1155 r180 top
U15 "TCA9406DCTR" TSOP65P400X130-8M 1090,2190 r270 top
Y1 "Q24FA20H0024700" FA-20H 1781.85,2359.18 r135 top

## Footprints (in the part's own frame and the unit in brackets; to place one, negate y for a bottom-side part, rotate by r counter-clockwise, add the part's x,y. Pads: shape width x height; smd on the part's side, far side on the other; paste and mask are expansions set on the pad)
3570.1419 [mil] "Grade Mini SIP - 1 Form A"
  rect 45.28x45.28 / inner round 41.83 / far side rect 45.28x45.28 hole 29.53: 1(-225,0)
  round 45.28 hole 29.53: 2(-75,0) 3(75,0) 4(225,0)
  body extent -305,-75 295,75, height 255
ATML-100A_M [mm] "TQFP, 100-Leads, Body 14x14mm, Pitch 0.5mm, IPC Low Density"
  oval 1.65x0.3 smd: 1(-7.825,6) 2(-7.825,5.5) 3(-7.825,5) 4(-7.825,4.5) 5(-7.825,4) 6(-7.825,3.5) 7(-7.825,3) 8(-7.825,2.5) 9(-7.825,2) 10(-7.825,1.5) 11(-7.825,1) 12(-7.825,0.5) 13(-7.825,0) 14(-7.825,-0.5) 15(-7.825,-1) 16(-7.825,-1.5) 17(-7.825,-2) 18(-7.825,-2.5) 19(-7.825,-3) 20(-7.825,-3.5) 21(-7.825,-4) 22(-7.825,-4.5) 23(-7.825,-5) 24(-7.825,-5.5) 25(-7.825,-6) 51(7.825,-6) 52(7.825,-5.5) 53(7.825,-5) 54(7.825,-4.5) 55(7.825,-4) 56(7.825,-3.5) 57(7.825,-3) 58(7.825,-2.5) 59(7.825,-2) 60(7.825,-1.5) 61(7.825,-1) 62(7.825,-0.5) 63(7.825,0) 64(7.825,0.5) 65(7.825,1) 66(7.825,1.5) 67(7.825,2) 68(7.825,2.5) 69(7.825,3) 70(7.825,3.5) 71(7.825,4) 72(7.825,4.5) 73(7.825,5) 74(7.825,5.5) 75(7.825,6)
  oval 0.3x1.65 smd: 26(-6,-7.825) 27(-5.5,-7.825) 28(-5,-7.825) 29(-4.5,-7.825) 30(-4,-7.825) 31(-3.5,-7.825) 32(-3,-7.825) 33(-2.5,-7.825) 34(-2,-7.825) 35(-1.5,-7.825) 36(-1,-7.825) 37(-0.5,-7.825) 38(0,-7.825) 39(0.5,-7.825) 40(1,-7.825) 41(1.5,-7.825) 42(2,-7.825) 43(2.5,-7.825) 44(3,-7.825) 45(3.5,-7.825) 46(4,-7.825) 47(4.5,-7.825) 48(5,-7.825) 49(5.5,-7.825) 50(6,-7.825) 76(6,7.825) 77(5.5,7.825) 78(5,7.825) 79(4.5,7.825) 80(4,7.825) 81(3.5,7.825) 82(3,7.825) 83(2.5,7.825) 84(2,7.825) 85(1.5,7.825) 86(1,7.825) 87(0.5,7.825) 88(0,7.825) 89(-0.5,7.825) 90(-1,7.825) 91(-1.5,7.825) 92(-2,7.825) 93(-2.5,7.825) 94(-3,7.825) 95(-3.5,7.825) 96(-4,7.825) 97(-4.5,7.825) 98(-5,7.825) 99(-5.5,7.825) 100(-6,7.825)
  silkscreen extent -7.95,-6.6 6.6,6.82, body extent -8,-8 8,8, height 1.2
C500h220z368#1 [mm] "C500h220z368 hole"
  round 5 hole 2.2: 1(0.892,-0.993)
C500h220z368#2 [mm] "C500h220z368 hole"
  round 5 hole 2.2: 1(-3.016,4.212)
C500h220z368#3 [mm] "C500h220z368 hole"
  round 5 hole 2.2: 1(1.808,2.942)
C500h220z368#4 [mm] "C500h220z368 hole"
  round 5 hole 2.2: 1(-2.327,-0.604)
CAPC1005X06M#1 [mm] "Chip Capacitor, 2-Leads, Body 1,00x0,50mm, IPC Low Density"
  rect 0.76x0.72 smd: 1(-0.49,0) 2(0.49,0)
  body extent -0.53,-0.28 0.53,0.28, height 0.55
CAPC1005X06M#2 [mm] "Chip Capacitor, 2-Leads, Body 1,00x0,50mm, IPC Low Density"
  rect 0.72x0.72 smd: 1(-0.51,0) 2(0.51,0)
  body extent -0.53,-0.28 0.53,0.28, height 0.55
CAPC1005X07M [mm] "Chip Capacitor, 2-Leads, Body 1,00x0,50mm, IPC Low Density"
  rect 0.88x0.82 smd: 1(-0.48,0) 2(0.48,0)
  body extent -0.6,-0.35 0.6,0.35, height 0.7
CAPC2012X14M [mm] "Chip Capacitor, 2-Leads, Body 2,00x1,25mm, IPC Low Density"
  rect 1.45x1.5 smd: 1(-0.925,0) 2(0.925,0)
  body extent -1.05,-0.67 1.05,0.67, height 1.35
CAPC3225X27M [mm] "Chip Capacitor, 2-Leads, Body 3,20x2,50mm, IPC Low Density"
  rect 1.75x2.8 smd: 1(-1.425,0) 2(1.425,0)
  silkscreen extent -0.15,-1.3 0.15,1.3, body extent -1.75,-1.35 1.75,1.35, height 2.7
DIOC1005X02R [mm] "Chip Diode, 2-Leads, Body 1,00x0,50mm, Manufacturer Recommended"
  rect 0.5x0.6 smd paste+0 mask+0: 1(-0.447,0) 2(0.453,0)
  silkscreen extent -0.98,0.42 -0.88,0.52, body extent -0.8,-0.43 0.8,0.43, height 0.25
FA-20H [mm] "SEIKO EPSON CRYSTAL"
  rect 1.2x1.1 smd paste+0 mask+0: 1(-0.85,-0.7) 2(0.85,-0.7) 3(0.85,0.7) 4(-0.85,0.7)
  silkscreen extent -2.15,-1.63 1.3,1.65, body extent -1.55,-1.35 1.55,1.35, height 0.25
FID1X2R [mm] "Fiducial - Round 1x2mm"
  round 1 smd paste-0.5 mask+0.5: 0(0,0)
  L1 keep-out circle w1: c0,0 r0.5
  L1 keep-out region: 0,0
LSHM_150_06_0_L_DV_A_N_K_TR [mm] "LSHM_150_06_0_L_DV_A_N_K_TR Without Shield"
  rect 0.3x1.5 smd: 1(12.25,-1.85) 2(12.25,1.85) 3(11.75,-1.85) 4(11.75,1.85) 5(11.25,-1.85) 6(11.25,1.85) 7(10.75,-1.85) 8(10.75,1.85) 9(10.25,-1.85) 10(10.25,1.85) 11(9.75,-1.85) 12(9.75,1.85) 13(9.25,-1.85) 14(9.25,1.85) 15(8.75,-1.85) 16(8.75,1.85) 17(8.25,-1.85) 18(8.25,1.85) 19(7.75,-1.85) 20(7.75,1.85) 21(7.25,-1.85) 22(7.25,1.85) 23(6.75,-1.85) 24(6.75,1.85) 25(6.25,-1.85) 26(6.25,1.85) 27(5.75,-1.85) 28(5.75,1.85) 29(5.25,-1.85) 30(5.25,1.85) 31(4.75,-1.85) 32(4.75,1.85) 33(4.25,-1.85) 34(4.25,1.85) 35(3.75,-1.85) 36(3.75,1.85) 37(3.25,-1.85) 38(3.25,1.85) 39(2.75,-1.85) 40(2.75,1.85) 41(2.25,-1.85) 42(2.25,1.85) 43(1.75,-1.85) 44(1.75,1.85) 45(1.25,-1.85) 46(1.25,1.85) 47(0.75,-1.85) 48(0.75,1.85) 49(0.25,-1.85) 50(0.25,1.85) 51(-0.25,-1.85) 52(-0.25,1.85) 53(-0.75,-1.85) 54(-0.75,1.85) 55(-1.25,-1.85) 56(-1.25,1.85) 57(-1.75,-1.85) 58(-1.75,1.85) 59(-2.25,-1.85) 60(-2.25,1.85) 61(-2.75,-1.85) 62(-2.75,1.85) 63(-3.25,-1.85) 64(-3.25,1.85) 65(-3.75,-1.85) 66(-3.75,1.85) 67(-4.25,-1.85) 68(-4.25,1.85) 69(-4.75,-1.85) 70(-4.75,1.85) 71(-5.25,-1.85) 72(-5.25,1.85) 73(-5.75,-1.85) 74(-5.75,1.85) 75(-6.25,-1.85) 76(-6.25,1.85) 77(-6.75,-1.85) 78(-6.75,1.85) 79(-7.25,-1.85) 80(-7.25,1.85) 81(-7.75,-1.85) 82(-7.75,1.85) 83(-8.25,-1.85) 84(-8.25,1.85) 85(-8.75,-1.85) 86(-8.75,1.85) 87(-9.25,-1.85) 88(-9.25,1.85) 89(-9.75,-1.85) 90(-9.75,1.85) 91(-10.25,-1.85) 92(-10.25,1.85) 93(-10.75,-1.85) 94(-10.75,1.85) 95(-11.25,-1.85) 96(-11.25,1.85) 97(-11.75,-1.85) 98(-11.75,1.85) 99(-12.25,-1.85) 100(-12.25,1.85)
  round 1.45 hole 1.45 unplated: ""(-13.5,-0.85) ""(13.5,-0.85)
  silkscreen extent -15.35,-3 15.35,3, body extent -14.88,-2.46 14.92,2.52, height 7.3
RESC1005X04M [mm] "Chip Resistor, 2-Leads, Body 1,00x0,50mm, IPC Low Density"
  rect 0.7x0.65 smd: 1(-0.475,0) 2(0.475,0)
  body extent -0.53,-0.28 0.53,0.28, height 0.37
RESC1608X06N [mm] "Chip Resistor, 2-Leads, Body 1,60x0,80mm, IPC Medium Density"
  rect 0.8x0.9 smd: 1(-0.8,0) 2(0.8,0)
  silkscreen extent -0.1,-0.35 0.1,0.35, body extent -0.85,-0.45 0.85,0.45, height 0.55
RESC3116X06M [mm] "Chip Resistor, 2-Leads, Body 3,10x1,60mm, IPC Low Density"
  rect 1.25x1.8 smd: 1(-1.525,0) 2(1.525,0)
  silkscreen extent -0.5,-0.8 0.5,0.8, body extent -1.6,-0.85 1.6,0.85, height 0.65
"SIP564W40P254L1980H810Q6 - Cloned" [mil] "SIP, 2.54 mm pitch; 7 pin, 19.80 mm L X 5.64 mm W X 8.10 mm H body"
  rect 45.28x45.28 / inner round 41.83 / far side rect 45.28x45.28 hole 29.53: 1(-300,0)
  round 45.28 hole 29.53: 2(-100,0) 3(100,0) 4(300,0) 5(-200,0) 6(200,0)
  body extent -374,-99 374,99, height 300
SOIC127P600X175-8M [mm] "SOIC, 8-Leads, Body 4,90x3,90mm, Pitch 1,27mm, IPC Low Density"
  oval 1.7x0.65 smd: 1(-2.8,1.905) 2(-2.8,0.635) 3(-2.8,-0.635) 4(-2.8,-1.905) 5(2.8,-1.905) 6(2.8,-0.635) 7(2.8,0.635) 8(2.8,1.905)
  silkscreen extent -2.92,-2.45 1.55,2.9, body extent -3,-2.45 3,2.45, height 1.75
SOP65P780X198-28M [mm] "SOP, 28-Leads, Body 10,21x5,30mm, Pitch 0,65mm, IPC Low Density"
  oval 1.85x0.55 smd: 1(-3.625,4.225) 2(-3.625,3.575) 3(-3.625,2.925) 4(-3.625,2.275) 5(-3.625,1.625) 6(-3.625,0.975) 7(-3.625,0.325) 8(-3.625,-0.325) 9(-3.625,-0.975) 10(-3.625,-1.625) 11(-3.625,-2.275) 12(-3.625,-2.925) 13(-3.625,-3.575) 14(-3.625,-4.225) 15(3.625,-4.225) 16(3.625,-3.575) 17(3.625,-2.925) 18(3.625,-2.275) 19(3.625,-1.625) 20(3.625,-0.975) 21(3.625,-0.325) 22(3.625,0.325) 23(3.625,0.975) 24(3.625,1.625) 25(3.625,2.275) 26(3.625,2.925) 27(3.625,3.575) 28(3.625,4.225)
  silkscreen extent -3.75,-5.15 2.3,5.17, body extent -3.89,-5.15 3.89,5.15, height 1.98
SOT95P280X145-6M [mm] "SOT23, 6-Leads, Body 2,90x2,80mm, Pitch 0,95mm, IPC Low Density"
  rect 1.2x0.65 smd: 1(-1.475,0.95) 2(-1.475,0) 3(-1.475,-0.95) 4(1.475,-0.95) 5(1.475,0) 6(1.475,0.95)
  silkscreen extent -1.6,-1.55 0.5,1.95, body extent -1.5,-1.53 1.5,1.53, height 1.45
TSOP65P400X130-8M [mm] "TSOP, 8-Leads, Body 2,95x2,80mm, Pitch 0,65mm, IPC Low Density"
  oval 1.25x0.45 smd: 1(-2.075,0.975) 2(-2.075,0.325) 3(-2.075,-0.325) 4(-2.075,-0.975) 5(2.075,-0.975) 6(2.075,-0.325) 7(2.075,0.325) 8(2.075,0.975)
  silkscreen extent -2.2,-1.6 1.05,1.88, body extent -2,-1.6 2,1.6, height 1.3
TSOP65P640X120-16M [mm] "TSOP, 16-Leads, Body 5,00x4,40mm, Pitch 0,65mm, IPC Low Density"
  oval 1.6x0.45 smd: 1(-3.05,2.275) 2(-3.05,1.625) 3(-3.05,0.975) 4(-3.05,0.325) 5(-3.05,-0.325) 6(-3.05,-0.975) 7(-3.05,-1.625) 8(-3.05,-2.275) 9(3.05,-2.275) 10(3.05,-1.625) 11(3.05,-0.975) 12(3.05,-0.325) 13(3.05,0.325) 14(3.05,0.975) 15(3.05,1.625) 16(3.05,2.275)
  silkscreen extent -3.18,-2.55 1.85,3.17, body extent -3.2,-2.55 3.2,2.55, height 1.2
TSW-103-08-F-D-RA [mil] "6 Pin Header Vertical, right-angle"
  round 63.78 hole 30: 1(-100,110) 2(-100,210) 3(0,110) 4(0,210) 5(100,110) 6(100,210)
  silkscreen extent -168,-298 168,260, body extent -150,-281 150,221, height 218
TSW-106-08-F-S-RA [mil] "6 Pin Header, right-angle, 1 row"
  round 63.78 hole 30: 1(-250,-110) 2(-150,-110) 3(-50,-110) 4(50,-110) 5(150,-110) 6(250,-110)
  silkscreen extent -318,-160 318,298, body extent -300,-122 300,280, height 121

## Part data
C1 C2 C3 C4 C5 C6 C7 C8 C9 C11 C12 C13 C15 C16 C17 C18 C19 C20 C21 C22 C23 C24 C27 C28 C29 C30 C31 C32: library part C01-0402-01-00001-1, "Cap Ceramic 100nF 50V X7R 5% SMD 0402 125°C", Capacitor Type=Ceramic, Case/Package=0402, Dielectric=X7R, Manufacturer=YAGEO, Max Operating Temperature=125°C, Min Operating Temperature=-55°C, Tolerance=5%, Voltage Rating=16V, Composition=Ceramic, Depth=500µm, Length=1mm, Manufacturer P/N=CC0402JRX7R7BB104, Mount="Surface Mount", Mounting Technology="Surface Mount", Pins=2, RoHS Compliant=Yes, Termination=SMD/SMT, Thickness=558.8µm, Voltage Rating (DC)=16V, Width=508µm
C10: library part C01-0402-01-00007-1, "Cap Ceramic 2.2uF 25V X7R +-10% SMD 0805 125°C", Capacitor Type=Ceramic, Case/Package=0805, Dielectric=XR7, Manufacturer=YAGEO, Max Operating Temperature=125°C, Min Operating Temperature=-55°C, Tolerance=10%, Voltage Rating=25V, Composition=Ceramic, Depth=1.25mm, Length=2mm, Manufacturer P/N=AC0805KKX7R8BB225, Mount="Surface Mount", Mounting Technology="Surface Mount", Pins=2, RoHS Compliant=Yes, Termination=SMD/SMT, Thickness=711.2µm, Voltage Rating (DC)=25V, Width=1.2466mm
C14: library part C01-0402-01-00006-2, "Cap Ceramic 10uF 10V XR5 20% SMD 0402 125°C", Capacitor Type=Ceramic, Case/Package=0402, Dielectric=XR5, Manufacturer=YAGEO, Max Operating Temperature=125°C, Min Operating Temperature=-55°C, Tolerance=20%, Voltage Rating=10V, Composition=Ceramic, Depth=500µm, Length=990.6µm, Manufacturer P/N=CC0402MRX5R6BB106, Mount="Surface Mount", Mounting Technology="Surface Mount", Pins=2, RoHS Compliant=Yes, Termination=SMD/SMT, Thickness=558.8µm, Voltage Rating (DC)=10V, Width=508µm
C25 C26: library part C01-0402-01-00008-1, "Cap Ceramic 20pF 50V C0G 5% SMD 0402 125°C", Capacitor Type=Ceramic, Case/Package=0402, Dielectric=COG, Manufacturer=YAGEO, Max Operating Temperature=125°C, Min Operating Temperature=-55°C, Tolerance=5%, Voltage Rating=50V, Composition=Ceramic, Depth=500µm, Length=990.6µm, Manufacturer P/N=CC0402JRNPO9BN200, Mount="Surface Mount", Mounting Technology="Surface Mount", Pins=2, RoHS Compliant=Yes, Termination=SMD/SMT, Thickness=558.8µm, Voltage Rating (DC)=50V, Width=508µm
C33 C34 C35: library part C01-0402-01-00002-1, "Multilayer Ceramic Capacitors (High dielectric type), 16V, 100 uF, ± 20 %, 1210, X5R, RoHS", Capacitor Type="Multilayer Ceramic", Case/Package=1210, Dielectric=XR5, Manufacturer="Taiyo Yuden", Max Operating Temperature=85°C, Min Operating Temperature=-55°C, Tolerance=20%, Voltage Rating=16V, Composition=Ceramic, Depth=2.2m, Length=3.5m, Manufacturer P/N=EMK325ABJ107MM-P, Mount=SMD, Mounting Technology=SMD, Pins=2, RoHS Compliant=Yes, Termination=-, Thickness=2.2m, Voltage Rating (DC)=16V, Width=2.8m
D1 D2 D3: library part D01-0402-01-00001-1, "Led red 0402", Case/Package=0402, Colour=red, Forward Current="20 mA", Forward Voltage=2V, Manufacturer=ROHM, Max Operating Temperature=85°C, Max Power Dissipation=52mW, Min Operating Temperature=-40°C, Dominant Wavelength="620 nm", Lens Style="Rectangular, Square", Luminous Intensity="85 mcd", Manufacturer P/N=SML-P12UTT86R, Mounting Technology=SMD, Number of LEDs=1, Pins=2, RoHS Compliant=Yes
D4 D5 D6 D7 D8 D9 D10 D11 D12 D13 D14 D15 D16 D17 D18 D19 D20 D21 D22 D23 D24 D25 D26 D27 D28 D29 D30 D31 D32 D33 D34: library part D01-0402-01-00000-1, "Led green 0402", Case/Package=0402, Colour=Green, Forward Current="20 mA", Forward Voltage=2.1V, Manufacturer=ROHM, Max Operating Temperature=85°C, Max Power Dissipation=52mW, Min Operating Temperature=-40°C, Dominant Wavelength="560 nm", Lens Style="Rectangular, Square", Luminous Intensity="10 mcd", Manufacturer P/N=SML-P13PTT86R, Mounting Technology=SMD, Number of LEDs=1, Pins=2, RoHS Compliant=Yes
FD1 FD2 FD3: library part CMP-00028-00005-2, "Fiducial - Round 1x2mm", Pins=0
J1 J2 J3 J4: library part J01-001-01-00001-2, "Conn Socket and Terminal Strip HDR/SKT 100 POS 0.5mm Solder ST SMD T/R", Case/Package=SMD, Housing Color=Black, Manufacturer=Samtec, Max Operating Temperature=125°C, Min Operating Temperature=-55°C, Contact Material=Bronze, Contact Plating=Gold, Depth="4.98 mm", Gender=HERMAPHRODITIC, Housing Material=Polymer, Length="29.7 mm", Manufacturer P/N=LSHM-150-06.0-L-DV-A-N-K-TR, Mounting Technology=SMD, Number of Rows=2, Orientation=Straight, Pins=100, Pitch="500 µm", RoHS Compliant=Yes, Termination=Solder
J5: library part J01-001-01-00003-2, "6 Vias Pin Header 2.54mm, Right Angle", Case/Package="Through Hole", Housing Color=Black, Manufacturer=Samtec, Max Operating Temperature=125°C, Min Operating Temperature=-55°C, Contact Material=Bronze, Contact Plating=Gold, Depth="4.87 mm", Gender=Male, Housing Material=Polyester, Length="7.62 mm", Manufacturer P/N=TSW-103-08-F-D-RA, Mounting Technology="Through Hole", Number of Rows=2, Orientation=Straight, Pins=6, Pitch=2.54mm, RoHS Compliant=Yes, Termination=Solder
J6: library part J01-001-01-00005-2, "6 Vias Pin Header 2.54mm, Right Angle, 1 Row", Case/Package="Through Hole", Housing Color=Black, Manufacturer=Samtec, Max Operating Temperature=125°C, Min Operating Temperature=-55°C, Contact Material=Bronze, Contact Plating=Gold, Depth="4.87 mm", Gender=Male, Housing Material=Polyester, Length="7.62 mm", Manufacturer P/N=HTSW-106-08-F-S-RA, Mounting Technology="Through Hole", Number of Rows=2, Orientation=Straight, Pins=6, Pitch=2.54mm, RoHS Compliant=Yes, Termination=Solder
K8 K9 K10 K11 K17 K18 K19 K20 K23 K24 K25 K36: library part K01-0008-01-00008-1, "Reed Relay, Mini SIP, 5 VDC; 1 Form A, 15W, 200 VDC, 1.25A", Case/Package=SIP, Coil Current=10mA, Coil Voltage (DC)=5V, Contact Current Rating=1A, Contact Resistence=0.15, Insulation Resistance=0, Manufacturer=Comus, Max Operating Temperature=85°C, Min Operating Temperature=-40°C, Switching Voltage=200V, Coil resitence=500, Coil Type=-, Contact Form=1A, Contact Material=-, Height=6.98mm, Manufacturer P/N=3570.1419.051, Mounting Technology=TH, Number of Terminal=4, Operate Time=350µs, Packaging=SIP, Pins=4, Relay Type=Reed, Release Time=100µs, Rise time=0s, RoHS=Yes, Switching Current=1A, Width=15.24mm
K12 K13 K14 K15 K16 K21 K22 K26 K27 K28 K29 K30 K31 K32 K33 K34 K35 K37 K38: library part K01-0008-01-00002-6, "Reed Relay 5VDC 350Ohm 0.5A SPST-NO THT", Case/Package=SIP, Coil Current=14.28mA, Coil Voltage (DC)=5V, Contact Current Rating=500mA, Contact Resistence=0.2, Insulation Resistance=1T, Manufacturer=COTO, Max Operating Temperature=85°C, Min Operating Temperature=-20°C, Switching Voltage=200V, Coil resitence=350, Coil Type=Non-Latching, Contact Form=SPST, Contact Material=Ruthenium, Height=7.6mm, Manufacturer P/N=9002-05-00, Mounting Technology="Through Hole", Number of Terminal=6, Operate Time=350µs, Packaging=Bulk, Pins=6, Relay Type=RF, Release Time=100µs, Rise time=350µs, RoHS=Yes, Switching Current=500mA, Width=19.3mm
MH1 MH2 MH3 MH4: library part CMP-00028-00007-1, "hole 5mm pad drill 2.2", Case/Package=Pad, Max Operating Temperature=-40°C, Min Operating Temperature=125°C, Mounting Technology=Pad, Pins=1, RoHS Compliant=yes
R1: library part R01-0402-01-00029-2, "RES SMD 1K OHM 1% 1/16W 0402", Case/Package=0402, Manufacturer=Yageo, Max Operating Temperature=155°C, Min Operating Temperature=-55°C, Power Rating=62.5mW, Temperature Coefficient="100 ppm/ºC", Tolerance=1%, Voltage Rating=50V, Composition="Thick Film", Features="Automotive AEC-Q200, Moisture Resistant", Height=370µm, Length=990.6µm, Manufacturer P/N=AC0402FR-071KL, Number of Terminations=2, Packaging="Tape & Reel", RoHS=Yes, Width=508µm
R2 R5 R6: library part R01-0402-01-00169-2, "RES SMD 10K OHM 1% 1/16W 0402", Case/Package=0402, Manufacturer=Yageo, Max Operating Temperature=155°C, Min Operating Temperature=-55°C, Power Rating=62.5mW, Temperature Coefficient="100 ppm/ºC", Tolerance=1%, Voltage Rating=50V, Composition="Thick Film", Features="Automotive AEC-Q200, Moisture Resistant", Height=370µm, Length=990.6µm, Manufacturer P/N=AC0402FR-0710KL, Number of Terminations=2, Packaging="Tape & Reel", RoHS=Yes, Width=508µm
R3 R4: library part R01-0603-01-00204-3, "RES SMD 150 OHM 1% 1/10W 0603", Case/Package=0603, Manufacturer=Yageo, Max Operating Temperature=155°C, Min Operating Temperature=-55°C, Power Rating=100mW, Temperature Coefficient="100 ppm/ºC", Tolerance=1%, Voltage Rating=50V, Voltage Rating1=75V, Composition="Thick Film", Features="Automotive AEC-Q200, Moisture Resistant", Height=550µm, Length=1.6002µm, Manufacturer P/N=AC0603FR-07150RL, Number of Terminations=2, Packaging="Tape & Reel", RoHS=Yes, Width=800µm
R7 R8 R9 R10 R11 R12 R13 R14 R15 R16 R17 R18 R19 R20 R21 R22 R23 R24 R25 R26 R27 R28 R29 R30 R31 R32 R33 R34 R35 R36 R37 R38 R39 R49: library part R01-0402-01-00437-2, "RES SMD 240 OHM 1% 1/16W 0402", Case/Package=0402, Manufacturer=Yageo, Max Operating Temperature=155°C, Min Operating Temperature=-55°C, Power Rating=62.5mW, Temperature Coefficient="100 ppm/ºC", Tolerance=1%, Voltage Rating=50V, Composition="Thick Film", Features="Automotive AEC-Q200, Moisture Resistant", Height=370µm, Length=990.6µm, Manufacturer P/N=AC0402FR-07240RL, Number of Terminations=2, Packaging="Tape & Reel", RoHS=Yes, Width=508µm
R40 R52: library part R01-0402-01-00067-3, "RES SMD 2K OHM 1% 1/16W 0402", Case/Package=0402, Manufacturer=Yageo, Max Operating Temperature=155°C, Min Operating Temperature=-55°C, Power Rating=62.5mW, Temperature Coefficient="100 ppm/ºC", Tolerance=1%, Voltage Rating=50V, Composition="Thick Film", Features="Automotive AEC-Q200, Moisture Resistant", Height=370µm, Length=990.6µm, Manufacturer P/N=AC0402FR-072KL, Number of Terminations=2, Packaging="Tape & Reel", RoHS=Yes, Width=508µm
R41 R42 R43 R44 R45 R46 R47 R48: library part R01-1206-01-00248-1, "RES SMD 300 OHM 1% 1/4W 1206", Case/Package=1206, Manufacturer=Yageo, Max Operating Temperature=155°C, Min Operating Temperature=-55°C, Power Rating=250mW, Temperature Coefficient="100 ppm/ºC", Tolerance=1%, Voltage Rating=150V, Composition="Thick Film", Features="Automotive AEC-Q200, Moisture Resistant", Height=650µm, Length=3.0988mm, Manufacturer P/N=AC1206FR-07300RL, Number of Terminations=2, Packaging="Tape & Reel", RoHS=Yes, Width=1.6002mm
R50 R51: library part R01-1206-01-00129-1, "RES SMD 24.9 OHM 1% 1/4W 1206", Case/Package=1206, Manufacturer=Yageo, Max Operating Temperature=155°C, Min Operating Temperature=-55°C, Power Rating=250mW, Temperature Coefficient="100 ppm/ºC", Tolerance=1%, Voltage Rating=150V, Composition="Thick Film", Features="Automotive AEC-Q200, Moisture Resistant", Height=650µm, Length=3.0988mm, Manufacturer P/N=AC1206FR-0724R9L, Number of Terminations=2, Packaging="Tape & Reel", RoHS=Yes, Width=1.6002mm
U1 U2 U4 U5 U8: library part CMP-0005-0001-00001-1, "50-V, 7-ch darlington transistor array, -40 to 105C 16-TSSOP -40 to 105", Case/Package=TSSOP, Manufacturer="Texas Instruments", Max Operating Temperature=-40°C, Min Operating Temperature=105°C, Voltage Rating=50V, Height=1.2mm, Length=5mm, Manufacturer P/N=ULN2003AIPWR, Mounting Technology=SMD, Pins=16, RoHS Compliant=yes, Width=4.4mm
U3: library part CMP-019-00050-1, "V-Ref Precision 3.3V 20mA 8-Pin SOIC", Case/Package=SOIC, Manufacturer=Microchip, Max Operating Temperature=125°C, Max Supply Voltage=5.5V, Min Operating Temperature=-40°C, Min Supply Voltage=1.65V, Output Current="20 mA", Output Voltage=3.3V, Temperature Coefficient="50 ppm/°C", Tolerance="0.1 %", Manufacturer P/N=MCP1501-33E/SN, Mounting Technology=SMD, Pins=8, RoHS Compliant=yes
U6: library part U01-0007-01-00000-1, "AVR ATmega Microcontroller 8-bit 16MHz 256KB FLASH TQFP100", Case/Package=A, Frequency=16MHz, Manufacturer=Microchip, Max Operating Temperature=85°C, Max Supply Voltage=5.5V, Min Operating Temperature=-40°C, Minimum Supply Voltage=4.5V, Contact Plating=Tin, Core Architecture=AVR, Height=1.2mm, Interface="I2C, SPI, UART", Manufacturer P/N=ATMEGA2560-16AU, Max Frequency=16MHz, Memory Size=256KB, Memory Type=FLASH, Mounting Technology=SMD, Number of A/D="1 AD / 16 channels", Number of I/O=86, Number of Programmable I/O=86, Oscillator Type=External, Peripherals="Brown-out Detect/Reset, POR, PWM, WDT", Pins=100, RAM Size=8KB, RoHS=Yes, Watchdog Timer=Yes, Width=16.25mm
U7: library part CMP-0015-00001-1, "1-Channel Single ADC Pipelined 20Msps 10-bit Parallel 28-Pin SSOP", Case/Package=SSOP, Manufacturer="Analog Devices", Max Operating Temperature=85°C, Min Operating Temperature=-40°C, Power=100mW, Channels=1, Interface=Parallel, Manufacturer P/N=AD9200ARSZRL, Mounting Technology=SMD, Pins=28, RoHS Compliant=yes
U9 U10 U11 U12 U13 U14: library part CMP-015-00009-2, "Voltage Level Translator 1-CH Bidirectional 6-Pin SOT-23", Case/Package=SOT-23, Manufacturer="Texas Instrument", Max Operating Temperature=85°C, Max Supply Voltage=5.5V, Min Operating Temperature=-40°C, Min Supply Voltage=1.2V, Data rate="100 Mbps", Manufacturer P/N=TXB0101DBVR, Mounting Technology=SMD, Pins=6, RoHS Compliant=yes
U15: library part CMP-015-00008-2, "2 BIT Bidirectional 1-MHz I2C BUS and SMBus Voltage Level Translator 8-Pin SSOP", Case/Package=SSOP8, Manufacturer="Texas Instrument", Max Operating Temperature=85°C, Max Supply Voltage=5.5V, Min Operating Temperature=-40°C, Min Supply Voltage=1.65V, Manufacturer P/N=TCA9406DCTR, Mounting Technology=SMD, Pins=8, RoHS Compliant=yes
Y1: library part Y01-0001-01-00000-10, "16MHz ±10ppm 16pF 80Ω SMD-2520_4P", Case/Package=SMD-2520_4P, Frequency=16MHz, Load Capacitance=16pF, Max Operating Temperature=85°C, Min Operating Temperature=-40°C, ESR=80, Mounting Technology=SMD, Pins=4, RoHS Compliant=yes

## Free pads (board coordinates)
  round 0.5 on Mech1: 1(0.25,0.25) 1(0.25,0.25) 1(0.25,3937.26) 1(0.25,3937.26) 1(3937.26,0.25) 1(3937.26,0.25) 1(3937.26,3937.26) 1(3937.26,3937.26)

## Via types
v1: diameter 17.72, hole 7.87, L1 to L4, 337 vias

## Nets (pads, with @x,y where several pads share a name; then routed paths per layer and width w, separated by ;. In a path a pad name is that pad's centre, name@x,y a point inside that pad or via, vN(x,y) a via of type N, cw(c..) or ccw(c..) an arc to the next point about the centre after c; other vN are vias at no path point)
3V3_REF: R1.2 R3.2 U3.7 U3.8 U7.18 U7.23 | length 1702.4
  L1 w4: v1@2039.57,2844.57 v1(2040,2845) ; v1(2675,3220) v1@2675.24,3219.76
  L1 w10: v1(1905,3000) R3.2@1905,2961.5 R3.2@1906.97,2961.5 ; U7.23@1977.28,2716.61 v1(2040,2716.61) ; U7.18@1977.28,2844.57 v1@2039.57,2844.57 ; U3.7@2675.24,3135 U3.8@2675.24,3185 ; v1@2675.24,3219.76 U3.8@2675.24,3185 ; R1.2@2747.6,3185 U3.8@2675.24,3185
  L3 w10: v1(1905,3000) 1965,3000 1995,2970 1995,2855 ; v1(2040,2716.61) 2018.39,2716.61 1995,2740 1995,2855 ; v1(2675,3220) 2650,3195 2310,3195 2245,3130 2245,2870 2220,2845 v1(2040,2845) 2005,2845 1995,2855
+3V3: C19.2 C20.2 C23.2 C24.2 C29.2 C30.2 C32.2 J1.18 J2.99 U9.1 U10.1 U11.1 U12.1 U13.1 U14.1 U15.3 U15.6 | length 909.7
  L1 w4: C32.2@1072.2,2332.91 C32.2@1075,2335.71 ; U11.1@1084.33,2995 U11.1@1086.93,2992.4 ; v1@1109.29,2335.71 v1(1110,2335) ; C23.2@2159.29,1545 2165,1550.71 C23.2@2165,1554.96 ; U10.1@2723.07,2417.6 U10.1@2733.9,2417.6 ; C19.2@2783.81,2156.26 C19.2@2785,2155 2785,2155.39 2784.11,2156.29 C19.2@2783.79,2156.29 ; C20.2@2790,1908.58 C20.2@2790,1909.37 ; v1@2823.58,1908.58 v1(2825,1910) ; v1@2929.29,1069.29 v1(2930,1070) ; U12.1@2219.19,1553.52 U12.1@2227.6,1561.93 2227.6,1583.52 2221.55,1561.93 U12.1@2219.19,1553.52
  L1 w10: v1(1010,3055) C24.2@1045,3055 1045,3010 1060,2995 U11.1@1084.33,2995 ; v1(1070,2055) 1077.2,2062.2 U15.6@1077.2,2108.31 ; C32.2@1075,2335.71 v1@1109.29,2335.71 ; U15.3@1077.2,2271.69 C32.2@1077.2,2332.91 ; C23.2@2165,1554.96 v1(2165,1580) ; C23.2@2165.39,1550.31 2160.08,1545 C23.2@2159.29,1545 2185,1545 2201.93,1561.93 U12.1@2227.6,1561.93 ; U9.1@2723.07,2177.6 2762.8,2177.6 2784.11,2156.29 C19.2@2785,2155.39 ; U13.1@2728.07,1927.6 2771.77,1927.6 C20.2@2790,1909.37 ; U10.1@2733.9,2417.6 2751.5,2400 C29.2@2785,2400 v1(2820,2400) ; C19.2@2785,2155 v1(2820,2155) ; C20.2@2790,1908.58 v1@2823.58,1908.58 ; U14.1@2853.07,1117.6 2882.4,1117.6 2895,1105 C30.2@2895,1069.29 v1@2929.29,1069.29
+5V: C1.2 C2.2 C3.2 C4.2 C5.2 C6.2 C7.2 C8.2 C9.2 C11.2 C12.2 C13.2 C17.2 C18.2 C21.2 C22.2 C27.2 C28.2 C31.2 J3.1 J3.3 J3.5 J4.2 J4.4 J4.6 J5.2 J6.1 K8.2 K9.2 K10.2 K11.2 K12.2 K13.2 K14.2 K15.2 K16.2 K17.2 K18.2 K19.2 K20.2 K21.2 K22.2 K23.2 K24.2 K25.2 K26.2 K27.2 K28.2 K29.2 K30.2 K31.2 K32.2 K33.2 K34.2 K35.2 K36.2 K37.2 K38.2 R2.2 R9.1 R10.1 R11.1 R12.1 R13.1 R14.1 R15.1 R16.1 R17.1 R18.1 R19.1 R20.1 R21.1 R22.1 R23.1 R24.1 R25.1 R26.1 R27.1 R28.1 R29.1 R30.1 R31.1 R32.1 R33.1 R34.1 R35.1 R36.1 R37.1 R38.1 R39.1 R40.2 R49.1 U1.9 U2.9 U3.1 U3.3 U4.9 U5.9 U6.10 U6.31 U6.61 U6.80 U6.98 U6.100 U8.9 U9.6 U10.6 U11.6 U12.6 U13.6 U14.6 U15.7 | length 3496
  L1 w4: v1(80,2655) 80,2644.69 105,2619.69 R33.1@105,2618.7 ; R26.1@90,1198.7 v1(90,1240) ; v1(95,1500) 97.32,1497.68 R21.1@97.32,1457.4 ; R36.1@100,1743.7 v1(100,1785) ; R27.1@100,3298.7 v1(100,3340) ; R32.1@105,2000 v1(105,2040) ; R28.1@105,2240 v1(105,2275) ; R34.1@105,2430 v1(105,2465) ; R49.1@110,2810 v1(110,2845) ; R10.1@110,3033.7 v1(110,3075) ; v1(305,145) 305,110.31 320.31,95 R31.1@321.3,95 ; v1(515,115) 515,110 530,95 R17.1@550.31,95 ; v1(730,120) 735,120 R16.1@760,95 ; C2.2@914.29,2725 919.92,2730.63 C2.2@920,2730.71 ; v1(950,130) 950,114.02 962.24,101.78 962.24,100.8 973.03,90 R23.1@974.01,90 ; v1(1070,1145) v1@1071.42,1146.42 ; C31.2@1102.8,2047.2 C31.2@1105,2045 ; v1(1155,125) 1155,95 1160,90 R24.1@1177.6,90 ; C5.2@1310,1955 C5.2@1310.63,1954.37 ; J3.1@1486.97,310.51 J3.3@1506.65,310.51 J3.5@1526.34,310.51 ; C4.2@1532.52,1537.48 C4.2@1535,1535 ; R38.1@1697.4,615 1697.4,582.6 1700,580 v1(1700,575) ; C9.2@1850.63,2285 C9.2@1851.42,2285 ; C6.2@1886.85,1538.15 C6.2@1890,1535 ; R39.1@1898.7,620 1899.69,620 1910.48,630.8 1910.48,631.78 1925,646.3 v1(1925,655) ; C7.2@1926.22,1543.78 C7.2@1935,1535 ; R2.2@1933.7,2335 v1(1970,2335) ; C8.2@2065.94,1855.94 C8.2@2070,1860 ; R29.1@2098.7,620 v1(2140,620) ; v1@2164.29,1709.29 v1(2165,1710) ; U12.6@2224.53,1675 U12.6@2227.6,1678.07 ; R13.1@2324.57,620 v1(2375,620) ; C3.2@2380,3190.71 2385,3185.71 C3.2@2385.71,3185 ; C11.2@2435,1005 C11.2@2435.43,1005.43 ; R9.1@2445,3805 v1(2485,3805) ; v1(2510,2160) v1@2511.42,2158.58 ; v1(2510,2395) v1@2510.71,2394.29 ; C27.2@2545,2158.58 C27.2@2545,2159.37 ; C18.2@2550,1910 C18.2@2550,1910.79 ; U10.6@2596.1,2417.6 U10.6@2606.93,2417.6 ; v1(2685,50) 2685,87.4 R19.1@2687.6,90 ; U14.6@2726.1,1117.6 U14.6@2736.93,1117.6 ; C12.2@2795.08,1530.63 C12.2@2795.71,1530 ; C13.2@2810,2649.29 C13.2@2810.71,2650 C13.2@2810.28,2650.43 ; v1(2905,90) R18.1@2952.6,90 ; v1(3165,95) R22.1@3202.6,95 ; v1(3435,90) R25.1@3478.03,90 ; R15.1@3845,1200 v1(3845,1245) ; R30.1@3845,1447.4 v1(3845,1485) ; R35.1@3845,1710 v1(3845,1755) ; R12.1@3845,1977.4 v1(3845,2020) ; R37.1@3845,2235 v1(3845,2275) ; R14.1@3845,2462.4 v1(3845,2500) ; R11.1@3845,2692.4 v1(3845,2745) ; v1(3845,2990) 3847.32,2987.68 R20.1@3847.32,2953.7
  L1 w10: v1(885,2725) C2.2@914.29,2725 ; U2.9@919.92,2679.57 C2.2@919.92,2730.63 ; v1@1071.42,1146.42 C1.2@1105,1146.42 1110,1141.42 1110,1099.65 U1.9@1109.92,1099.57 ; C31.2@1102.8,2047.2 U15.7@1102.8,2108.31 ; C31.2@1105,2045 v1(1140,2045) ; U11.6@1203.07,2992.4 1211.87,2992.4 1219.66,3000.2 1219.66,3039.89 1225.52,3045.75 1230.83,3045.75 1240,3054.92 C21.2@1240,3055.71 ; 1245,3055 v1(1265,3055) ; C5.2@1310,1955 v1(1310,1990) ; C5.2@1310.63,1954.37 U6.61@1381.93,1954.37 ; C4.2@1532.52,1537.48 U6.80@1532.52,1606.93 ; C4.2@1535,1535 v1(1575,1535) ; v1(1815,2275) 1825,2285 1850.63,2285 1827.8,2262.17 U6.31@1827.8,2223.07 ; v1(1855,1535) C6.2@1890,1535 ; C6.2@1886.85,1538.15 U6.98@1886.85,1606.93 ; R40.2@1890,2495 v1(1925,2495) ; C7.2@1926.22,1543.78 U6.100@1926.22,1606.93 ; C7.2@1935,1535 v1(1970,1535) ; U6.10@1998.07,1855.94 C8.2@2065.94,1855.94 ; v1@2164.29,1709.29 C22.2@2164.29,1675 U12.6@2224.53,1675 ; v1(2385,3155) C3.2@2385,3185.71 ; C3.2@2385.71,3185 U3.1@2454.76,3185 ; v1(2395,1005) C11.2@2435,1005 ; v1(2395,3085) U3.3@2454.76,3085 ; C11.2@2435.43,1005.43 U4.9@2435.43,1074.92 ; v1@2510.71,2394.29 C28.2@2545,2394.29 2572.8,2394.29 U10.6@2596.1,2417.6 ; v1@2511.42,2158.58 C27.2@2545,2158.58 ; v1(2515,1910) C18.2@2550,1910 ; C27.2@2545,2159.37 2563.23,2177.6 U9.6@2606.93,2177.6 ; C18.2@2550,1910.79 2566.81,1927.6 U13.6@2611.93,1927.6 ; U14.6@2726.1,1117.6 2726.1,1071.1 2725,1070 v1(2760,1070) ; U8.9@2745.08,2650.43 C13.2@2810.28,2650.43 ; C12.2@2795.08,1530.63 U5.9@2795.08,1565.43 ; v1(2795.71,1494.29) C12.2@2795.71,1530 ; v1(2810,2610) C13.2@2810,2649.29
  L4 w4: J4.2@1486.97,310.51 J4.4@1506.65,310.51 J4.6@1526.34,310.51
+5V_EN: J1.56 J2.61 R6.2 U6.16 | length 1746.1
  L1 w4: R6.2@2069.06,1974.06 R6.2@2070,1975 2070,1950 2085,1935 2175,1935 2190,1950 v1(2190,2075) ; v1(2080,3361.6) 2080,3065 v1(2150,2995)
  L1 w10: U6.16@1998.07,1974.06 R6.2@2069.06,1974.06
  L4 w4: v1(2080,3361.6) J2.61@2080,3420.75 ; v1(2150,2995) 2150,2115 v1(2190,2075)
A: J3.7 J4.8 K8.4 K9.4 K10.4 K11.4 K12.4 | length 1456.3
  L1 w11.55: K12.4@385,290 388.63,290 408.63,270 K10.4@830,270 K9.4@1035,270 K8.4@1234.02,270 1325,270 1365,310 1365,390 1395,420 1530,420 1543.82,406.18 1543.82,389.13 1546.02,386.93 J3.7@1546.02,310.51
  L4 w11.55: v1(1545,387.95) 1545.89,387.06 1545.89,310.64 J4.8@1546.02,310.51
A1: K12.1 R41.2 R42.2 R43.2 R44.2 R45.2 R46.2 R47.2 R48.2 | length 4452.7
  L1 w4: R44.2@1405,2850 R44.2@1405,2850 R44.2@1405,2850 ; R46.2@1405,3050 R46.2@1405,3050 ; R47.2@1404.96,3150 R47.2@1404.96,3150 ; R48.2@1404.96,3250 R48.2@1404.96,3260.83
  L1 w11.55: K12.1@385,890 350,890 225,1015 225,3280 300,3355 1310.79,3355 R48.2@1404.96,3260.83 ; R41.2@1404.96,2535 R42.2@1404.96,2650 R43.2@1404.96,2750 R44.2@1405,2850 ; R44.2@1405,2850 R45.2@1404.96,2950 R46.2@1405,3050 ; R47.2@1404.96,3150 R48.2@1404.96,3250 ; R46.2@1405,3050 R47.2@1404.96,3150
ADDR: J1.40 J2.55
ALARM: R7.1 U6.47 | length 2497.9
  L1 w4: v1(1005,3300) 1045,3300 1055.86,3310.86 1084.14,3310.86 1090,3305 1176.31,3305 1243,3238.31 1243,3178.31 1293,3128.31 1293,2397 1330,2360 1490,2360 1524.52,2325.48 1524.52,2274.52 1512.83,2262.83 U6.47@1512.83,2223.07 ; R7.1@1590,3800 R7.1@1592.4,3800 v1(1640,3800)
  L4 w4: v1(1005,3300) 1035,3300 1050,3315 1115,3315 1261,3461 1261,3626.51 1394.49,3760 1610,3760 1640,3790 v1(1640,3800)
ALERT: J1.38 J2.53
B: J3.9 J4.10 K13.4 | length 2171.9
  L1 w11.55: K13.4@300,1135 300,1080 435,945 435,525 ; 470,490 435,525 ; J3.9@1565.71,310.51 1565.71,364.29 1565.66,364.34 v1(1565.66,365) 1565.66,419.34 1535,450 1370,450 1325,405 1325,365 1295,335 625,335 435,525
  L4 w11.55: J4.10@1565.71,310.51 v1(1565.66,365)
C: J3.11 J4.12 K14.4 | length 2287.2
  L1 w11.55: K14.4@300,1405 300,1260 345,1215 345,1105 470,980 470,555 545,480 1545,480 1585.29,439.71 v1(1585.29,385) 1585.39,384.9 J3.11@1585.39,310.51
  L4 w11.55: v1(1585.29,385) 1585.29,310.62 J4.12@1585.39,310.51
CLK_IN: K35.1 U7.15 | length 1943
  L1 w4: U7.15@1973.91,2924.72 U7.15@1977.28,2921.34 ; U7.15@1985,2920 2075,2920 2095,2900 2095,2570 2150,2515 2652.66,2515 2680,2487.66 2680,2095 2715,2060 3000,2060 3045,2105 K35.1@3045,2185
COIL8: D18.1 K8.3 U4.10 | length 2194.4
  L1 w4: D18.1@1303.92,90 1303.92,173.92 v1(1305,175) ; v1(2395,1135) 2445,1135 2461.02,1118.98 U4.10@2461.02,1074.92
  L4 w4: v1(1305,175) 1305,280 1234.02,350.99 K8.3@1234.02,420 1395,420 1525,550 1525,995 1585,1055 2115,1055 2195,1135 v1(2395,1135)
COIL9: D17.1 K9.3 U1.16 | length 1084.8
  L1 w4: v1(955,165) 1080,165 1095,150 1095,90.98 D17.1@1094.02,90 ; v1(1050,915) 1053.71,915 1059.14,920.43 U1.16@1109.92,920.43
  L4 w4: v1(955,165) 955,285 1035,365 K9.3@1035,420 1030,420 1006.36,443.64 1006.36,871.36 v1(1050,915)
COIL10: D10.1 K10.3 U1.15 | length 1097.2
  L1 w4: D10.1@885.02,95 v1(920,95) ; v1(1015,940) 1018.71,940 1024.74,946.02 U1.15@1109.92,946.02
  L4 w4: v1(920,95) 920,300 830,390 K10.3@830,420 840,420 840,430 955,545 955,880 v1(1015,940)
COIL11: D11.1 K11.3 U1.14 | length 1298.2
  L1 w4: D11.1@671.63,95 v1(705,95) ; v1(1040,970) 1040.81,970.81 1109.11,970.81 U1.14@1109.92,971.61
  L4 w4: v1(705,95) 695,105 695,290 625,360 K11.3@625,420 710,420 785,495 845,495 925,575 925,905 990,970 v1(1040,970)
COIL12: D25.1 K12.3 U1.13 | length 1604.1
  L1 w4: D25.1@445,95 v1(485,95) ; v1(1015,1000) 1016.4,998.6 1108.52,998.6 U1.13@1109.92,997.2
  L4 w4: v1(485,95) 485,360 385,460 K12.3@385,490 690,490 735,535 735,600 765,630 865,630 890,655 890,915 975,1000 v1(1015,1000)
COIL13: D20.1 K13.3 U1.12 | length 1154.1
  L1 w4: v1(90,1040) D20.1@90,1079.57 ; v1(1040,1025) 1041.1,1023.9 1108.82,1023.9 U1.12@1109.92,1022.8
  L4 w4: v1(90,1040) 405,1040 K13.3@500,1135 507.9,1127.1 507.9,1112.1 595,1025 v1(1040,1025)